# EAGLE board ThingPlus_Micromod-Panel (EAGLE 9.6.2), part 1 of 6
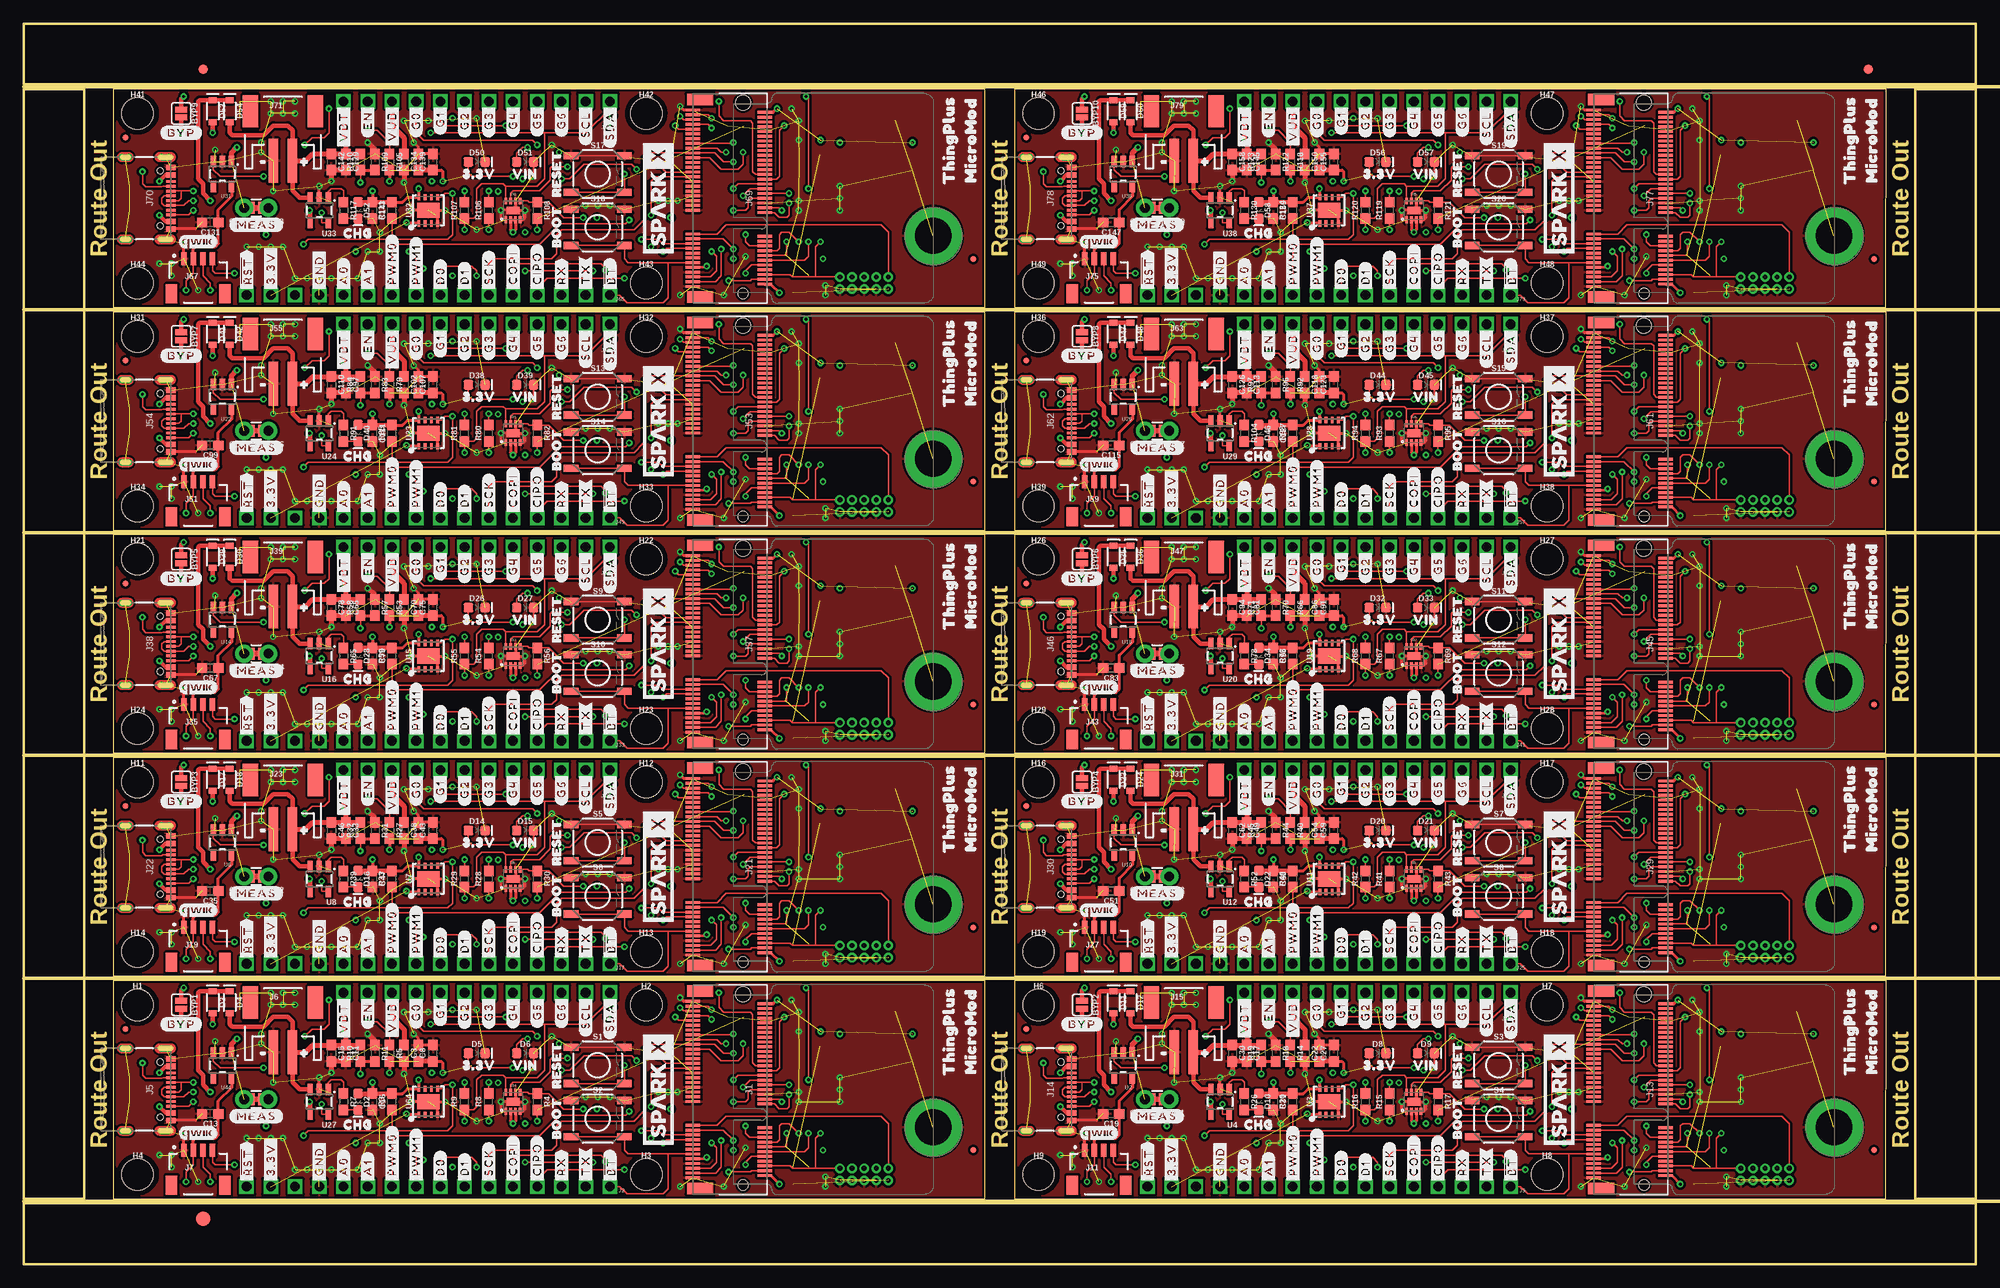
[diagram p0: board, top side]
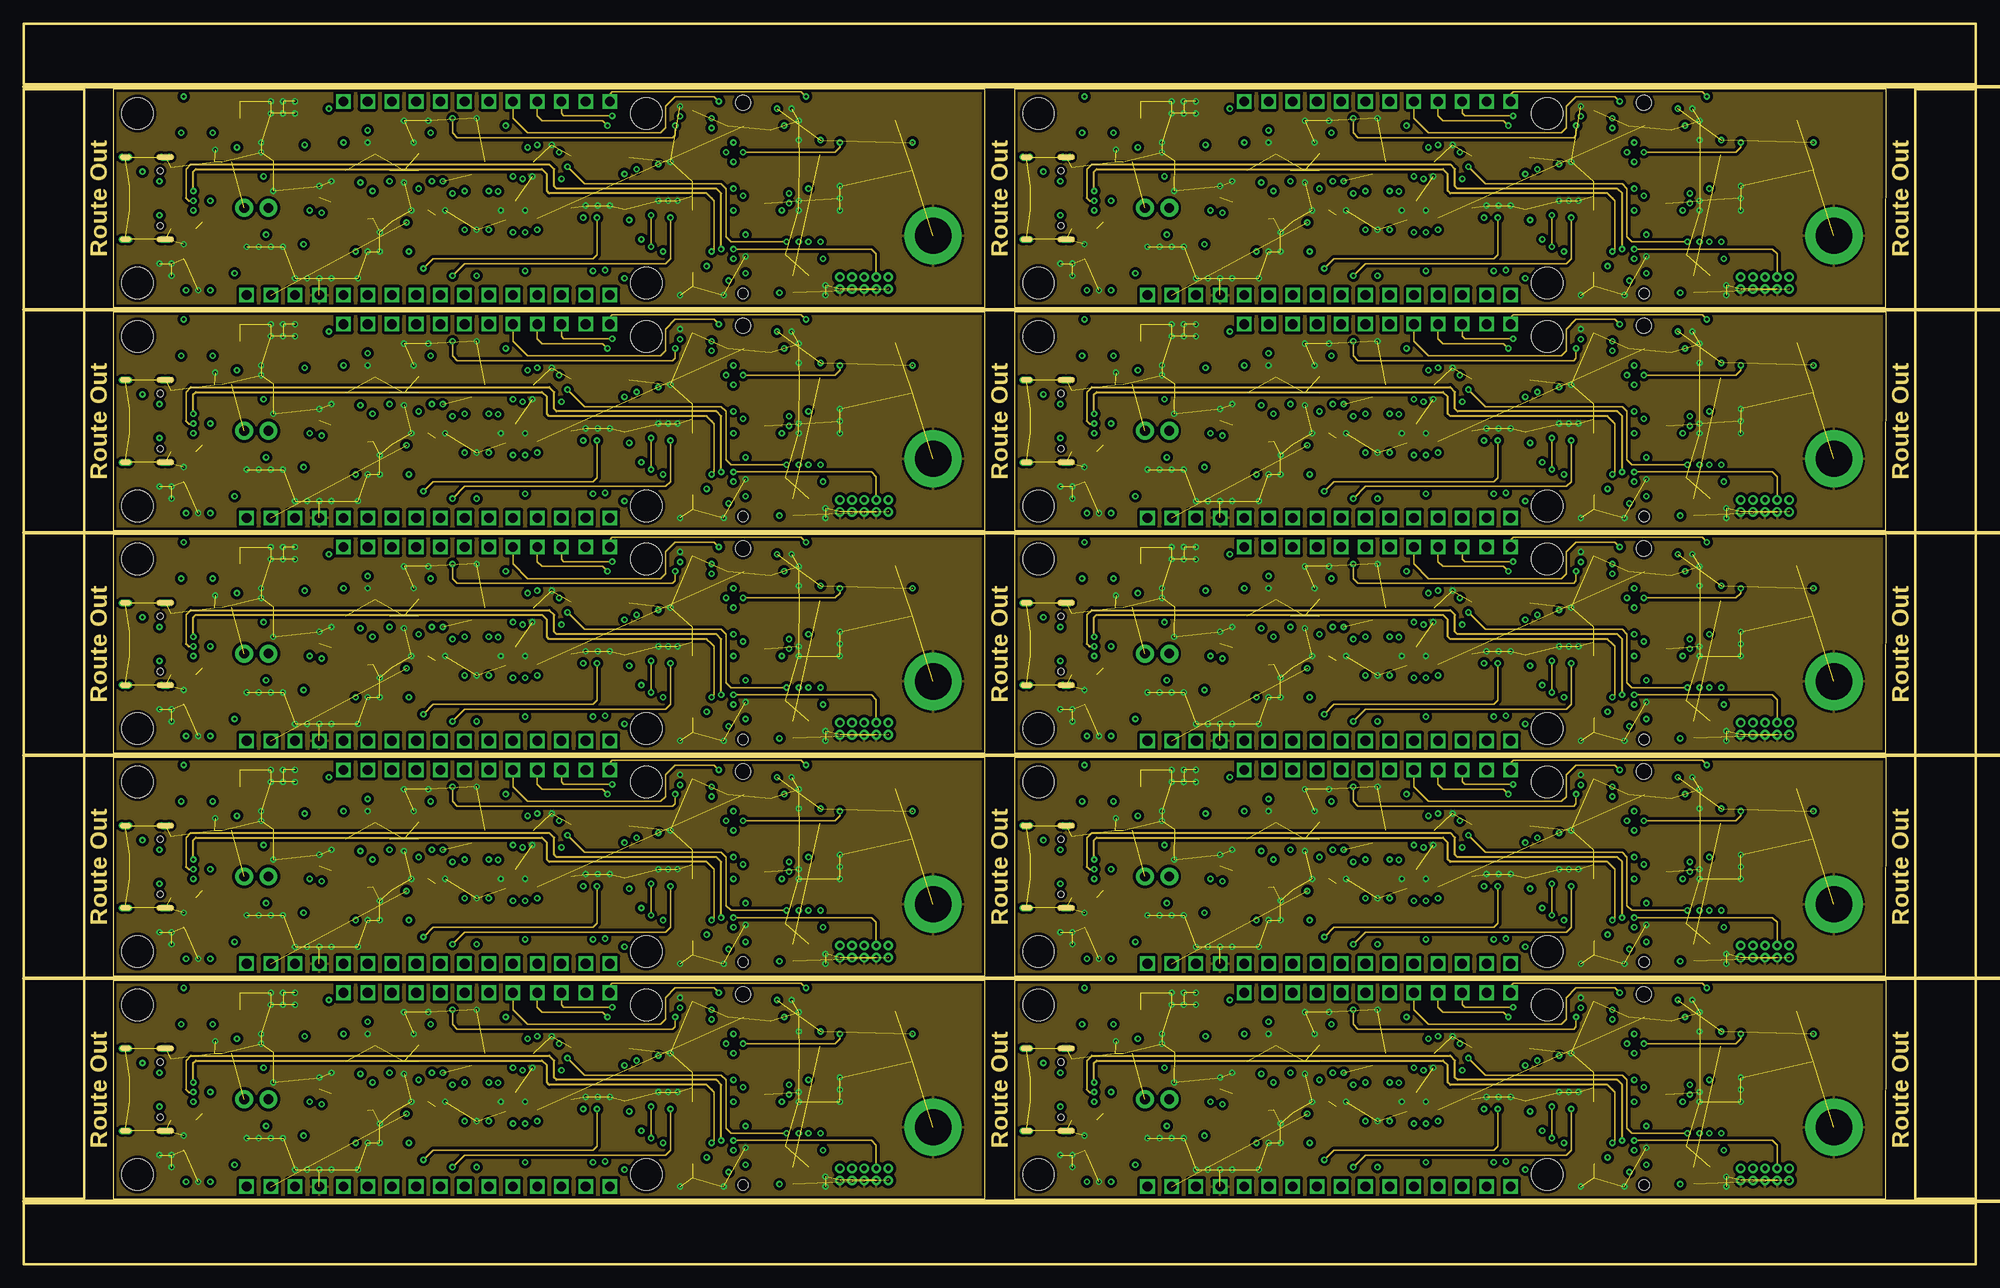
[diagram p1: board, inner layer Route2]
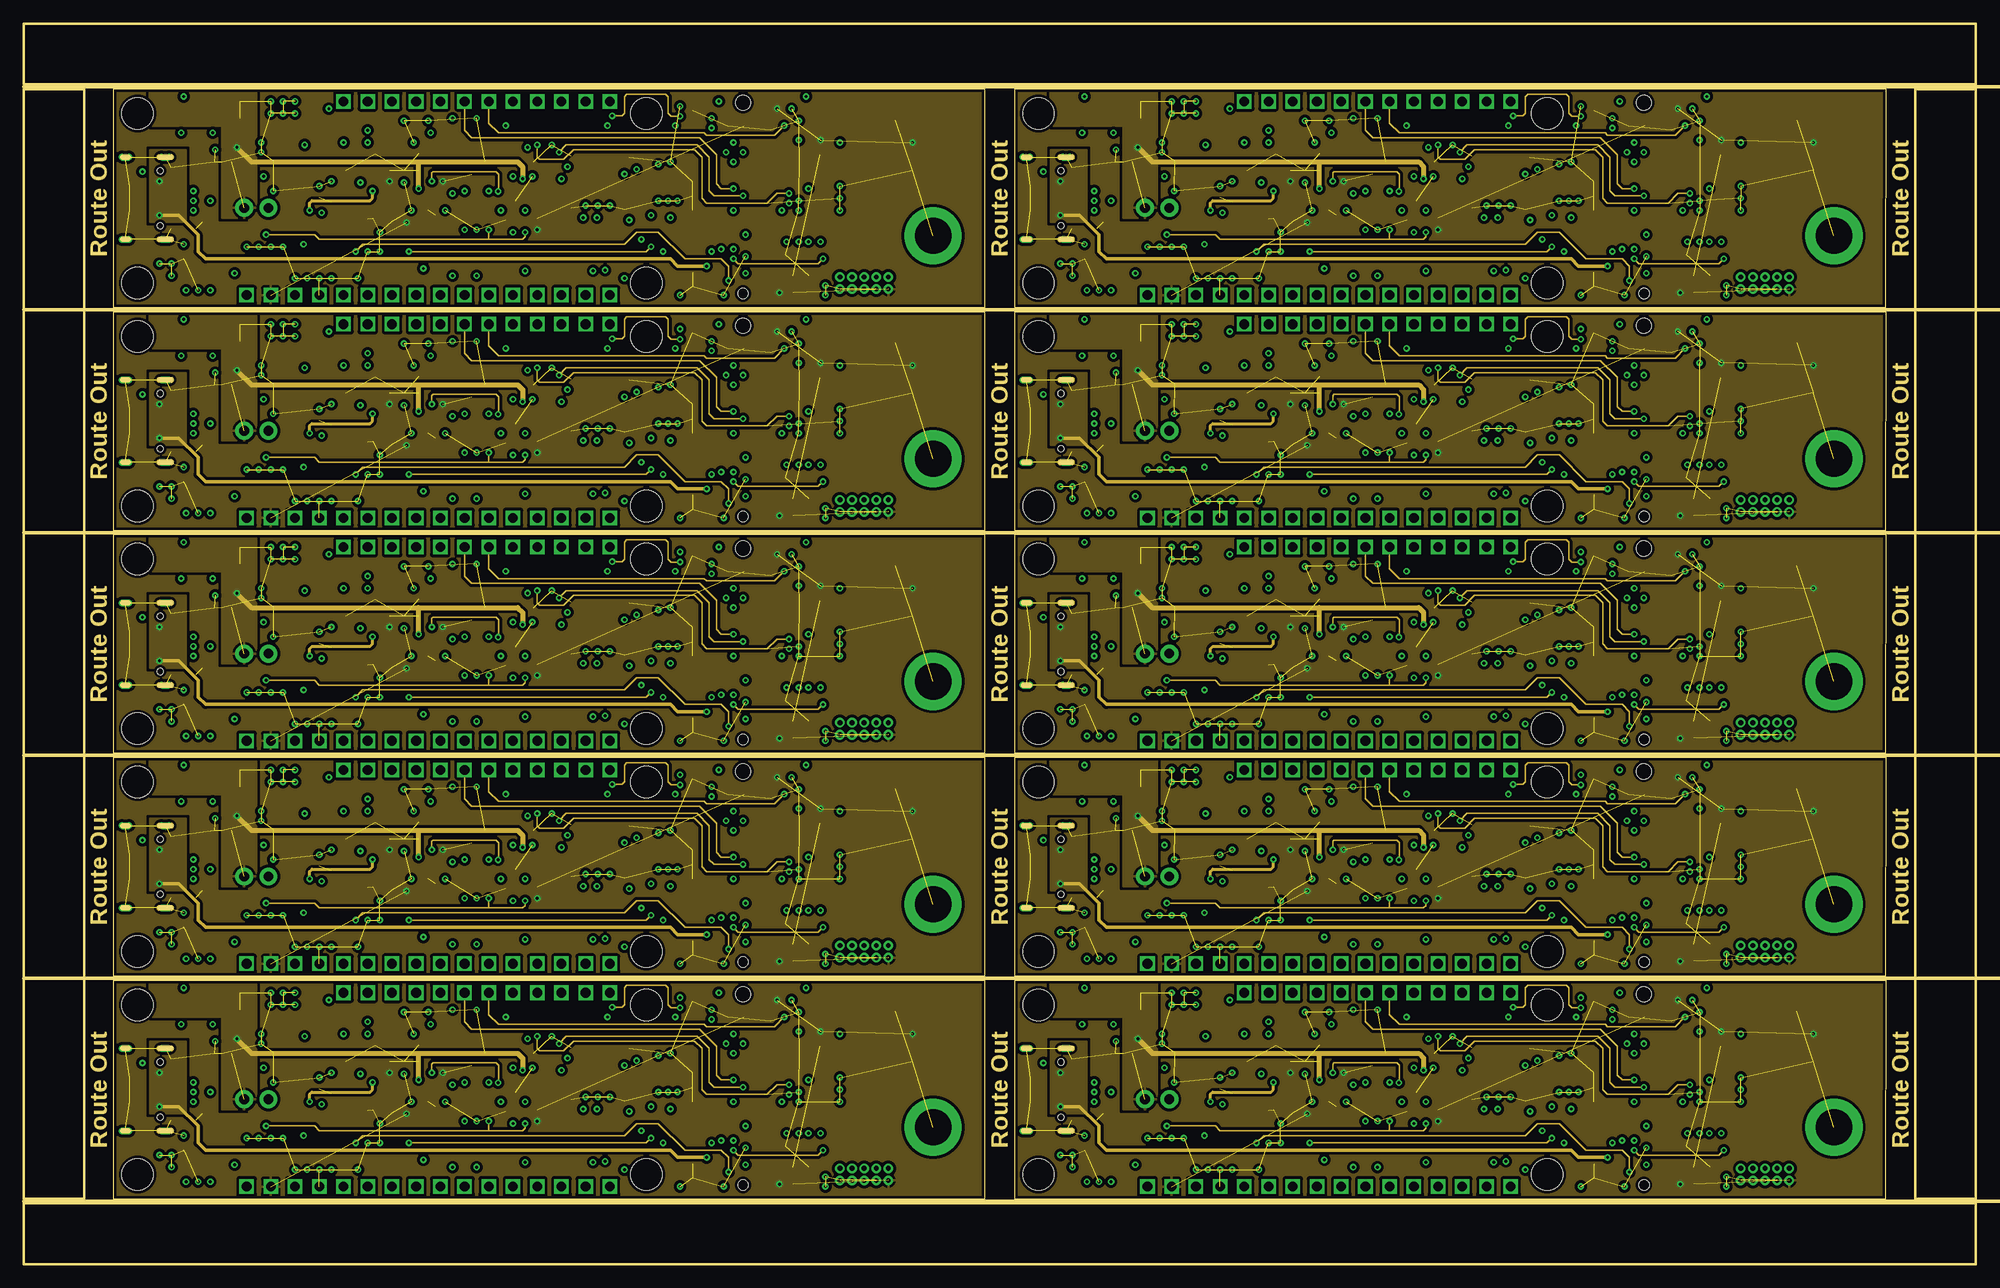
[diagram p2: board, inner layer Route15]
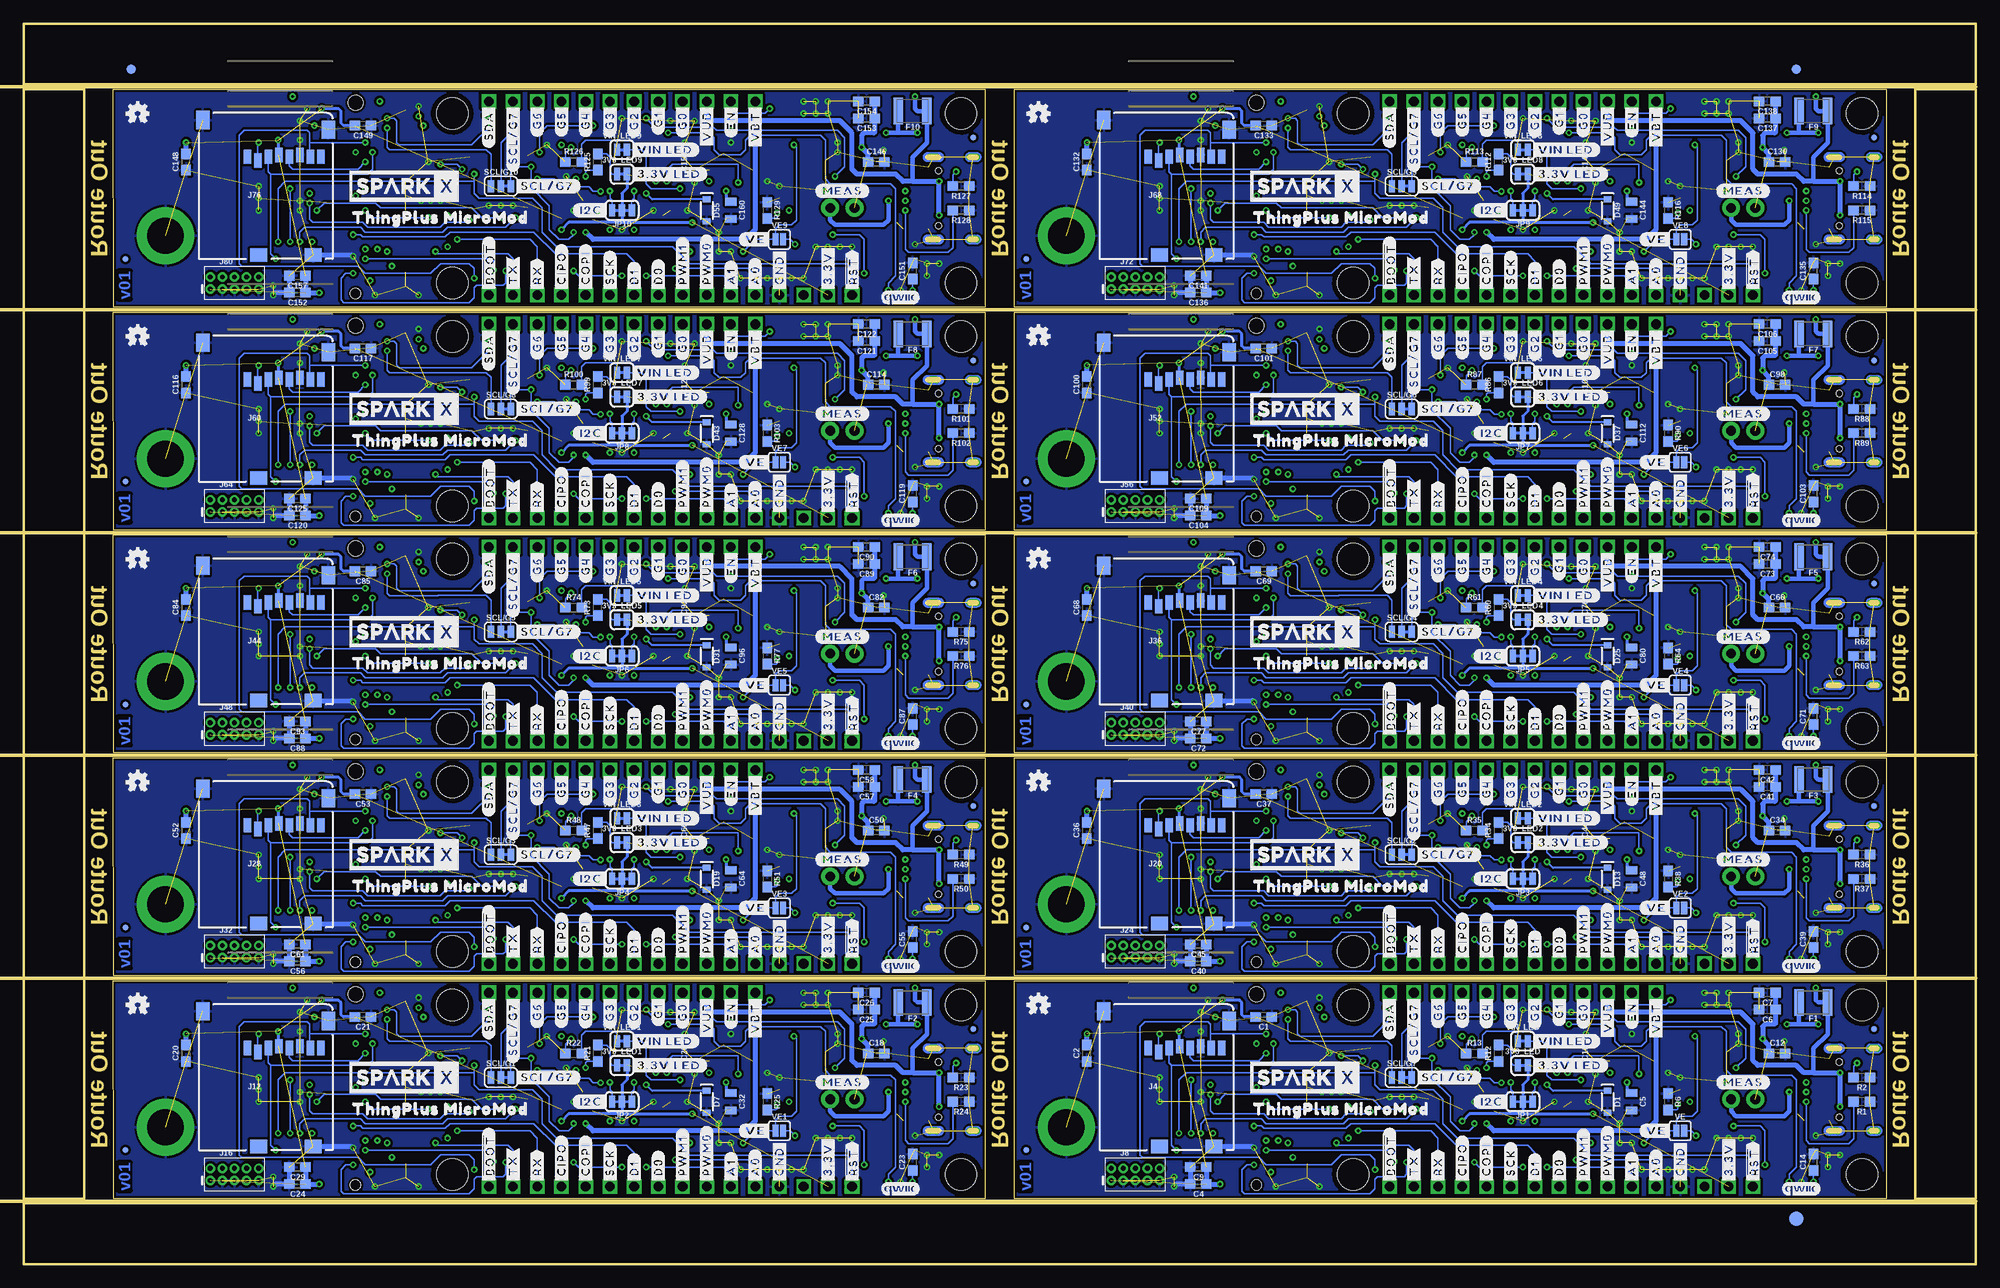
[diagram p3: board, bottom side, seen from below]

Size 204.72 x 130.05 mm. Coordinates in mm from the lower left corner, seen from the top.
Outline: 9.4,6.86 100.82,6.86 100.84,29.72 9.4,29.72 9.4,6.86
Outline: 103.89,6.86 195.31,6.86 195.33,29.72 103.89,29.72 103.89,6.86
Outline: 9.4,30.23 100.82,30.23 100.84,53.09 9.4,53.09 9.4,30.23
Outline: 103.89,30.23 195.31,30.23 195.33,53.09 103.89,53.09 103.89,30.23
Outline: 9.4,53.59 100.82,53.59 100.84,76.45 9.4,76.45 9.4,53.59
Outline: 103.89,53.59 195.31,53.59 195.33,76.45 103.89,76.45 103.89,53.59
Outline: 9.4,76.96 100.82,76.96 100.84,99.82 9.4,99.82 9.4,76.96
Outline: 103.89,76.96 195.31,76.96 195.33,99.82 103.89,99.82 103.89,76.96
Outline: 9.4,100.33 100.82,100.33 100.84,123.19 9.4,123.19 9.4,100.33
Outline: 103.89,100.33 195.31,100.33 195.33,123.19 103.89,123.19 103.89,100.33
Outline: 0,6.35 204.72,6.35 204.72,0 0,0 0,6.35
Outline: 198.37,123.19 204.72,123.19 204.72,6.86 198.37,6.86 198.37,123.19
Outline: 0,130.05 204.72,130.05 204.72,123.7 0,123.7 0,130.05
Outline: 0,123.19 6.35,123.19 6.35,6.86 0,6.86 0,123.19
Copper layers (1+2*15+16): Top 0.035559375mm / dielectric 0.47751875mm / Route2 0.035559375mm / dielectric 0.47751875mm / Route15 0.035559375mm / dielectric 0.47751875mm / Bottom 0.035559375mm
Design rules "ThingPlus_Micromod": minimum track width 7mil, minimum drill 12mil, track to track 7mil, track to pad 7mil, pad to pad 7mil, via to via 7mil, smd to smd 7mil, copper to edge 7mil, drill to drill 7mil, minimum pad ring 7mil, minimum via ring 7mil, stop-mask expansion 4mil, vias tented up to drill 25mil, thermal gap 10mil
Net classes: 0 default: width 0 mm, drill 0 mm
Milling: 6 lines

## Footprints (pad centres in the part's own frame; a part is rotated, then mirrored left to right if it is on the bottom)
SMT-JUMPER_2_NC_TRACE_SILK = smd 0.66 x 1.27: 1 -0.521,0; 2 0.521,0
SMT-JUMPER_2_NO_SILK = smd 0.635 x 1.27: 1 -0.406,0; 2 0.406,0
0603 = smd 1.1 x 1: 1 -0.85,0; 2 0.85,0
0805 = smd 0.8 x 1.2: 1 -0.9,0; 2 0.9,0
COMBO-JUMPER_2_NC_TRACE = smd 0.635 x 1.27: 1 -0.508,0; 2 0.508,0 | drill 1.016 pad 1.88: 3 -1.27,0; 4 1.27,0
SOD-323 = smd 0.63 x 0.83: A 1.15,0; C -1.15,0
LED-0603 = smd 1 x 1: A -0.877,0; C 0.877,0
FIDUCIAL-1X2 = smd 1 x 1: 1 0,0
FIDUCIAL-1.5X3 = smd 1.5 x 1.5: 1 0,0
1210 = smd 1 x 2.8: 1 -1.5,0; 2 1.5,0
FIDUCIAL-MICRO = smd 0.635 x 0.635: 1 0,0
STAND-OFF = hole 3.302: 0,0
STAND-OFF-REFLOW-M2.5 = drill 3.8 pad 6: 1 0,0
M.2-CONNECTOR-E = smd 0.3 x 1.55: 1 9.25,-5.275; 2 9,2.275; 3 8.75,-5.275; 4 8.5,2.275; 5 8.25,-5.275; 6 8,2.275; 7 7.75,-5.275; 8 7.5,2.275; 9 7.25,-5.275; 10 7,2.275; 11 6.75,-5.275; 12 6.5,2.275; 13 6.25,-5.275; 14 6,2.275; 15 5.75,-5.275; 16 5.5,2.275; 17 5.25,-5.275; 18 5,2.275; 19 4.75,-5.275; 20 4.5,2.275; 21 4.25,-5.275; 22 4,2.275; 23 3.75,-5.275; 32 1.5,2.275; 33 1.25,-5.275; 34 1,2.275; 35 0.75,-5.275; 36 0.5,2.275; 37 0.25,-5.275; 38 0,2.275; 39 -0.25,-5.275; 40 -0.5,2.275; 41 -0.75,-5.275; 42 -1,2.275; 43 -1.25,-5.275; 44 -1.5,2.275; 45 -1.75,-5.275; 46 -2,2.275; 47 -2.25,-5.275; 48 -2.5,2.275; 49 -2.75,-5.275; 50 -3,2.275; 51 -3.25,-5.275; 52 -3.5,2.275; 53 -3.75,-5.275; 54 -4,2.275; 55 -4.25,-5.275; 56 -4.5,2.275; 57 -4.75,-5.275; 58 -5,2.275; 59 -5.25,-5.275; 60 -5.5,2.275; 61 -5.75,-5.275; 62 -6,2.275; 63 -6.25,-5.275; 64 -6.5,2.275; 65 -6.75,-5.275; 66 -7,2.275; 67 -7.25,-5.275; 68 -7.5,2.275; 69 -7.75,-5.275; 70 -8,2.275; 71 -8.25,-5.275; 72 -8.5,2.275; 73 -8.75,-5.275; 74 -9,2.275; 75 -9.25,-5.275 | smd 1.2 x 2.75: A1 10.35,-4.5; A2 -10.35,-4.5 | hole 1.1: 10,0 | hole 1.6: -10,0
1X16_SM_SQ_NOSILK = drill 1.016 pad 1.27 square: 1 0,0; 2 2.54,0; 3 5.08,0; 4 7.62,0; 5 10.16,0; 6 12.7,0; 7 15.24,0; 8 17.78,0; 9 20.32,0; 10 22.86,0; 11 25.4,0; 12 27.94,0; 13 30.48,0; 14 33.02,0; 15 35.56,0; 16 38.1,0
1X12_SM_SQ_NOSILK = drill 1.016 pad 1.27 square: 1 0,0; 2 2.54,0; 3 5.08,0; 4 7.62,0; 5 10.16,0; 6 12.7,0; 7 15.24,0; 8 17.78,0; 9 20.32,0; 10 22.86,0; 11 25.4,0; 12 27.94,0
MICRO-SD-SOCKET = smd 1.8 x 1.4: CD1 -2.05,0.4; CD2 -7.75,0.4 | smd 0.8 x 1.5: CS/DAT3 -7.84,10.3; DAT1 -1.24,10.7; DAT2 -8.94,10.7; DI/CMD -6.74,10.7; DO/DAT0 -2.34,10.7; GND -3.44,10.9; SCLK -4.54,10.7; VCC -5.64,10.9 | smd 1.4 x 1.9: GND1 -13.6,14.55; GND3 -0.45,13.55
USB-C-16P_4LAYER-PADS = smd 0.3 x 1: A5 -1.25,-0.34; A6 -0.25,-0.34; A7 0.25,-0.34; A8 1.25,-0.34; B5 1.75,-0.34; B6 0.75,-0.34; B7 -0.75,-0.34; B8 -1.75,-0.34 | smd 0.6 x 1: GND -3.225,-0.34; GND2 3.225,-0.34; VBUS1 -2.45,-0.34; VBUS2 2.45,-0.34 | drill 0.4 pad 0.6 long: SHLD1 -4.318,-0.915; SHLD2 4.318,-0.915; SHLD3 -4.318,-5.095; SHLD4 4.318,-5.095 | hole 0.65: -2.89,-1.445; 2.89,-1.445
JST-2-SMD = smd 1 x 4.6: 1 -1,-3.7; 2 1,-3.7 | smd 1.6 x 3.4: NC1 -3.4,1.5; NC2 3.4,1.5
JST04_1MM_RA = smd 0.6 x 1.35: 1 -1.5,0; 2 -0.5,0; 3 0.5,0; 4 1.5,0 | smd 1.2 x 2: NC1 2.8,-3.675; NC2 -2.8,-3.675
2X5-PTH-1.27MM = drill 0.508 pad 1: 1 -2.54,-0.635; 2 -2.54,0.635; 3 -1.27,-0.635; 4 -1.27,0.635; 5 0,-0.635; 6 0,0.635; 7 1.27,-0.635; 8 1.27,0.635; 9 2.54,-0.635; 10 2.54,0.635
SMT-JUMPER_3_2-NC_TRACE_SILK = smd 0.66 x 1.27: 1 -1.041,0; 2 0,0; 3 1.041,0
TACTILE_SWITCH_SMD_5.2MM = smd 1.524 x 0.762: 1 -2.794,1.905; 2 2.794,1.905; 3 -2.794,-1.905; 4 2.794,-1.905
SMT-JUMPER_3_1-NC_TRACE_SILK = smd 0.66 x 1.27: 1 -1.041,0; 2 0,0; 3 1.041,0
DFN-8 = smd 0.3 x 0.7: 1 -0.75,-0.99; 2 -0.25,-0.99; 3 0.25,-0.99; 4 0.75,-0.99; 5 0.75,0.99; 6 0.25,0.99; 7 -0.25,0.99; 8 -0.75,0.99 | smd 1.38 x 0.8: 9 0,0
SOT23-5 = smd 0.55 x 1.2: 1 -0.95,-1.3; 2 0,-1.3; 3 0.95,-1.3; 4 0.95,1.3; 5 -0.95,1.3
UDFN-8 = smd 0.3 x 0.65: 1 -0.975,-1.375; 2 -0.325,-1.375; 3 0.325,-1.375; 4 0.975,-1.375; 5 0.975,1.375; 6 0.325,1.375; 7 -0.325,1.375; 8 -0.975,1.375 | smd 2.35 x 1.6: EP 0,0

## Placement (x,y rotation side)
3V3_LED  [SMT-JUMPER_2_NC_TRACE_SILK]  47.5,20.83 0 bottom
3V3_LED1  [SMT-JUMPER_2_NC_TRACE_SILK]  141.99,20.83 0 bottom
3V3_LED2  [SMT-JUMPER_2_NC_TRACE_SILK]  47.5,44.2 0 bottom
3V3_LED3  [SMT-JUMPER_2_NC_TRACE_SILK]  141.99,44.2 0 bottom
3V3_LED4  [SMT-JUMPER_2_NC_TRACE_SILK]  47.5,67.56 0 bottom
3V3_LED5  [SMT-JUMPER_2_NC_TRACE_SILK]  141.99,67.56 0 bottom
3V3_LED6  [SMT-JUMPER_2_NC_TRACE_SILK]  47.5,90.93 0 bottom
3V3_LED7  [SMT-JUMPER_2_NC_TRACE_SILK]  141.99,90.93 0 bottom
3V3_LED8  [SMT-JUMPER_2_NC_TRACE_SILK]  47.5,114.3 0 bottom
3V3_LED9  [SMT-JUMPER_2_NC_TRACE_SILK]  141.99,114.3 0 bottom
BYP1  JUMPER-SMT_2_NO_SILK  [SMT-JUMPER_2_NO_SILK]  16.51,27.18 270 top
BYP2  JUMPER-SMT_2_NO_SILK  [SMT-JUMPER_2_NO_SILK]  111,27.18 270 top
BYP3  JUMPER-SMT_2_NO_SILK  [SMT-JUMPER_2_NO_SILK]  16.51,50.55 270 top
BYP4  JUMPER-SMT_2_NO_SILK  [SMT-JUMPER_2_NO_SILK]  111,50.55 270 top
BYP5  JUMPER-SMT_2_NO_SILK  [SMT-JUMPER_2_NO_SILK]  16.51,73.91 270 top
BYP6  JUMPER-SMT_2_NO_SILK  [SMT-JUMPER_2_NO_SILK]  111,73.91 270 top
BYP7  JUMPER-SMT_2_NO_SILK  [SMT-JUMPER_2_NO_SILK]  16.51,97.28 270 top
BYP8  JUMPER-SMT_2_NO_SILK  [SMT-JUMPER_2_NO_SILK]  111,97.28 270 top
BYP9  JUMPER-SMT_2_NO_SILK  [SMT-JUMPER_2_NO_SILK]  16.51,120.65 270 top
BYP10  JUMPER-SMT_2_NO_SILK  [SMT-JUMPER_2_NO_SILK]  111,120.65 270 top
C1  0.1uF  [0603]  74.68,25.91 180 bottom
C2  1.0uF  [0603]  93.22,22.1 90 bottom
C3  0.1uF  [0603]  39.88,22.1 270 top
C4  0.1uF  [0603]  81.53,8.38 180 bottom
C5  10uF  [0805]  36.07,17.02 270 bottom
C6  0.22uF  [0603]  21.84,26.67 180 bottom
C7  0.1uF  [0603]  21.84,28.45 180 bottom
C8  1.0uF  [0603]  42.93,22.1 90 top
C9  0.22uF  [0603]  81.53,10.16 180 bottom
C10  0.1uF  [0603]  41.4,22.1 90 top
C11  0.1uF  [0603]  33.78,22.1 270 top
C12  1.0uF  [0603]  20.83,22.1 0 bottom
C13  1.0uF  [0603]  19.56,15.75 180 top
C14  0.1uF  [0603]  17.02,10.67 90 bottom
C15  4.7uF  [0603]  32.26,22.1 270 top
C16  4.7uF  [0603]  36.58,17.02 270 top
C17  0.1uF  [0603]  128.27,22.1 270 top
C18  1.0uF  [0603]  115.32,22.1 0 bottom
C19  1.0uF  [0603]  114.05,15.75 180 top
C20  1.0uF  [0603]  187.71,22.1 90 bottom
C21  0.1uF  [0603]  169.16,25.91 180 bottom
C22  0.1uF  [0603]  134.37,22.1 270 top
C23  0.1uF  [0603]  111.51,10.67 90 bottom
C24  0.1uF  [0603]  176.02,8.38 180 bottom
C25  0.22uF  [0603]  116.33,26.67 180 bottom
C26  0.1uF  [0603]  116.33,28.45 180 bottom
C27  1.0uF  [0603]  137.41,22.1 90 top
C28  0.1uF  [0603]  135.89,22.1 90 top
C29  0.22uF  [0603]  176.02,10.16 180 bottom
C30  4.7uF  [0603]  126.75,22.1 270 top
C31  4.7uF  [0603]  131.06,17.02 270 top
C32  10uF  [0805]  130.56,17.02 270 bottom
C33  0.1uF  [0603]  33.78,45.47 270 top
C34  1.0uF  [0603]  20.83,45.47 0 bottom
C35  1.0uF  [0603]  19.56,39.12 180 top
C36  1.0uF  [0603]  93.22,45.47 90 bottom
C37  0.1uF  [0603]  74.68,49.28 180 bottom
C38  0.1uF  [0603]  39.88,45.47 270 top
C39  0.1uF  [0603]  17.02,34.04 90 bottom
C40  0.1uF  [0603]  81.53,31.75 180 bottom
C41  0.22uF  [0603]  21.84,50.04 180 bottom
C42  0.1uF  [0603]  21.84,51.82 180 bottom
C43  1.0uF  [0603]  42.93,45.47 90 top
C44  0.1uF  [0603]  41.4,45.47 90 top
C45  0.22uF  [0603]  81.53,33.53 180 bottom
C46  4.7uF  [0603]  32.26,45.47 270 top
C47  4.7uF  [0603]  36.58,40.39 270 top
C48  10uF  [0805]  36.07,40.39 270 bottom
C49  0.1uF  [0603]  128.27,45.47 270 top
C50  1.0uF  [0603]  115.32,45.47 0 bottom
C51  1.0uF  [0603]  114.05,39.12 180 top
C52  1.0uF  [0603]  187.71,45.47 90 bottom
C53  0.1uF  [0603]  169.16,49.28 180 bottom
C54  0.1uF  [0603]  134.37,45.47 270 top
C55  0.1uF  [0603]  111.51,34.04 90 bottom
C56  0.1uF  [0603]  176.02,31.75 180 bottom
C57  0.22uF  [0603]  116.33,50.04 180 bottom
C58  0.1uF  [0603]  116.33,51.82 180 bottom
C59  1.0uF  [0603]  137.41,45.47 90 top
C60  0.1uF  [0603]  135.89,45.47 90 top
C61  0.22uF  [0603]  176.02,33.53 180 bottom
C62  4.7uF  [0603]  126.75,45.47 270 top
C63  4.7uF  [0603]  131.06,40.39 270 top
C64  10uF  [0805]  130.56,40.39 270 bottom
C65  0.1uF  [0603]  33.78,68.83 270 top
C66  1.0uF  [0603]  20.83,68.83 0 bottom
C67  1.0uF  [0603]  19.56,62.48 180 top
C68  1.0uF  [0603]  93.22,68.83 90 bottom
C69  0.1uF  [0603]  74.68,72.64 180 bottom
C70  0.1uF  [0603]  39.88,68.83 270 top
C71  0.1uF  [0603]  17.02,57.4 90 bottom
C72  0.1uF  [0603]  81.53,55.12 180 bottom
C73  0.22uF  [0603]  21.84,73.41 180 bottom
C74  0.1uF  [0603]  21.84,75.18 180 bottom
C75  1.0uF  [0603]  42.93,68.83 90 top
C76  0.1uF  [0603]  41.4,68.83 90 top
C77  0.22uF  [0603]  81.53,56.9 180 bottom
C78  4.7uF  [0603]  32.26,68.83 270 top
C79  4.7uF  [0603]  36.58,63.75 270 top
C80  10uF  [0805]  36.07,63.75 270 bottom
C81  0.1uF  [0603]  128.27,68.83 270 top
C82  1.0uF  [0603]  115.32,68.83 0 bottom
C83  1.0uF  [0603]  114.05,62.48 180 top
C84  1.0uF  [0603]  187.71,68.83 90 bottom
C85  0.1uF  [0603]  169.16,72.64 180 bottom
C86  0.1uF  [0603]  134.37,68.83 270 top
C87  0.1uF  [0603]  111.51,57.4 90 bottom
C88  0.1uF  [0603]  176.02,55.12 180 bottom
C89  0.22uF  [0603]  116.33,73.41 180 bottom
C90  0.1uF  [0603]  116.33,75.18 180 bottom
C91  1.0uF  [0603]  137.41,68.83 90 top
C92  0.1uF  [0603]  135.89,68.83 90 top
C93  0.22uF  [0603]  176.02,56.9 180 bottom
C94  4.7uF  [0603]  126.75,68.83 270 top
C95  4.7uF  [0603]  131.06,63.75 270 top
C96  10uF  [0805]  130.56,63.75 270 bottom
C97  0.1uF  [0603]  33.78,92.2 270 top
C98  1.0uF  [0603]  20.83,92.2 0 bottom
C99  1.0uF  [0603]  19.56,85.85 180 top
C100  1.0uF  [0603]  93.22,92.2 90 bottom
C101  0.1uF  [0603]  74.68,96.01 180 bottom
C102  0.1uF  [0603]  39.88,92.2 270 top
C103  0.1uF  [0603]  17.02,80.77 90 bottom
C104  0.1uF  [0603]  81.53,78.49 180 bottom
C105  0.22uF  [0603]  21.84,96.77 180 bottom
C106  0.1uF  [0603]  21.84,98.55 180 bottom
C107  1.0uF  [0603]  42.93,92.2 90 top
C108  0.1uF  [0603]  41.4,92.2 90 top
C109  0.22uF  [0603]  81.53,80.26 180 bottom
C110  4.7uF  [0603]  32.26,92.2 270 top
C111  4.7uF  [0603]  36.58,87.12 270 top
C112  10uF  [0805]  36.07,87.12 270 bottom
C113  0.1uF  [0603]  128.27,92.2 270 top
C114  1.0uF  [0603]  115.32,92.2 0 bottom
C115  1.0uF  [0603]  114.05,85.85 180 top
C116  1.0uF  [0603]  187.71,92.2 90 bottom
C117  0.1uF  [0603]  169.16,96.01 180 bottom
C118  0.1uF  [0603]  134.37,92.2 270 top
C119  0.1uF  [0603]  111.51,80.77 90 bottom
C120  0.1uF  [0603]  176.02,78.49 180 bottom
C121  0.22uF  [0603]  116.33,96.77 180 bottom
C122  0.1uF  [0603]  116.33,98.55 180 bottom
C123  1.0uF  [0603]  137.41,92.2 90 top
C124  0.1uF  [0603]  135.89,92.2 90 top
C125  0.22uF  [0603]  176.02,80.26 180 bottom
C126  4.7uF  [0603]  126.75,92.2 270 top
C127  4.7uF  [0603]  131.06,87.12 270 top
C128  10uF  [0805]  130.56,87.12 270 bottom
C129  0.1uF  [0603]  33.78,115.57 270 top
C130  1.0uF  [0603]  20.83,115.57 0 bottom
C131  1.0uF  [0603]  19.56,109.22 180 top
C132  1.0uF  [0603]  93.22,115.57 90 bottom
C133  0.1uF  [0603]  74.68,119.38 180 bottom
C134  0.1uF  [0603]  39.88,115.57 270 top
C135  0.1uF  [0603]  17.02,104.14 90 bottom
C136  0.1uF  [0603]  81.53,101.85 180 bottom
C137  0.22uF  [0603]  21.84,120.14 180 bottom
C138  0.1uF  [0603]  21.84,121.92 180 bottom
C139  1.0uF  [0603]  42.93,115.57 90 top
C140  0.1uF  [0603]  41.4,115.57 90 top
C141  0.22uF  [0603]  81.53,103.63 180 bottom
C142  4.7uF  [0603]  32.26,115.57 270 top
C143  4.7uF  [0603]  36.58,110.49 270 top
C144  10uF  [0805]  36.07,110.49 270 bottom
C145  0.1uF  [0603]  128.27,115.57 270 top
C146  1.0uF  [0603]  115.32,115.57 0 bottom
C147  1.0uF  [0603]  114.05,109.22 180 top
C148  1.0uF  [0603]  187.71,115.57 90 bottom
C149  0.1uF  [0603]  169.16,119.38 180 bottom
C150  0.1uF  [0603]  134.37,115.57 270 top
C151  0.1uF  [0603]  111.51,104.14 90 bottom
C152  0.1uF  [0603]  176.02,101.85 180 bottom
C153  0.22uF  [0603]  116.33,120.14 180 bottom
C154  0.1uF  [0603]  116.33,121.92 180 bottom
C155  1.0uF  [0603]  137.41,115.57 90 top
C156  0.1uF  [0603]  135.89,115.57 90 top
C157  0.22uF  [0603]  176.02,103.63 180 bottom
C158  4.7uF  [0603]  126.75,115.57 270 top
C159  4.7uF  [0603]  131.06,110.49 270 top
C160  10uF  [0805]  130.56,110.49 270 bottom
CURR_MEAS  [COMBO-JUMPER_2_NC_TRACE]  24.38,17.27 180 top
CURR_MEAS1  [COMBO-JUMPER_2_NC_TRACE]  118.87,17.27 180 top
CURR_MEAS2  [COMBO-JUMPER_2_NC_TRACE]  24.38,40.64 180 top
CURR_MEAS3  [COMBO-JUMPER_2_NC_TRACE]  118.87,40.64 180 top
CURR_MEAS4  [COMBO-JUMPER_2_NC_TRACE]  24.38,64.01 180 top
CURR_MEAS5  [COMBO-JUMPER_2_NC_TRACE]  118.87,64.01 180 top
CURR_MEAS6  [COMBO-JUMPER_2_NC_TRACE]  24.38,87.38 180 top
CURR_MEAS7  [COMBO-JUMPER_2_NC_TRACE]  118.87,87.38 180 top
CURR_MEAS8  [COMBO-JUMPER_2_NC_TRACE]  24.38,110.74 180 top
CURR_MEAS9  [COMBO-JUMPER_2_NC_TRACE]  118.87,110.74 180 top
D1  3.3V  [SOD-323]  38.61,17.02 270 bottom
D2  Yellow  [LED-0603]  35.05,17.02 270 top
D3  3A/10V/280mV  [SOD-323]  19.81,27.43 270 top
D4  3A/10V/280mV  [SOD-323]  21.59,27.43 270 top
D5  RED  [LED-0603]  47.5,22.1 0 top
D6  Yellow  [LED-0603]  52.58,22.1 0 top
D7  3.3V  [SOD-323]  133.1,17.02 270 bottom
D8  RED  [LED-0603]  141.99,22.1 0 top
D9  Yellow  [LED-0603]  147.07,22.1 0 top
D10  Yellow  [LED-0603]  129.54,17.02 270 top
D11  3A/10V/280mV  [SOD-323]  114.3,27.43 270 top
D12  3A/10V/280mV  [SOD-323]  116.08,27.43 270 top
D13  3.3V  [SOD-323]  38.61,40.39 270 bottom
D14  RED  [LED-0603]  47.5,45.47 0 top
D15  Yellow  [LED-0603]  52.58,45.47 0 top
D16  Yellow  [LED-0603]  35.05,40.39 270 top
D17  3A/10V/280mV  [SOD-323]  19.81,50.8 270 top
D18  3A/10V/280mV  [SOD-323]  21.59,50.8 270 top
D19  3.3V  [SOD-323]  133.1,40.39 270 bottom
D20  RED  [LED-0603]  141.99,45.47 0 top
D21  Yellow  [LED-0603]  147.07,45.47 0 top
D22  Yellow  [LED-0603]  129.54,40.39 270 top
D23  3A/10V/280mV  [SOD-323]  114.3,50.8 270 top
D24  3A/10V/280mV  [SOD-323]  116.08,50.8 270 top
D25  3.3V  [SOD-323]  38.61,63.75 270 bottom
D26  RED  [LED-0603]  47.5,68.83 0 top
D27  Yellow  [LED-0603]  52.58,68.83 0 top
D28  Yellow  [LED-0603]  35.05,63.75 270 top
D29  3A/10V/280mV  [SOD-323]  19.81,74.17 270 top
D30  3A/10V/280mV  [SOD-323]  21.59,74.17 270 top
D31  3.3V  [SOD-323]  133.1,63.75 270 bottom
D32  RED  [LED-0603]  141.99,68.83 0 top
D33  Yellow  [LED-0603]  147.07,68.83 0 top
D34  Yellow  [LED-0603]  129.54,63.75 270 top
D35  3A/10V/280mV  [SOD-323]  114.3,74.17 270 top
D36  3A/10V/280mV  [SOD-323]  116.08,74.17 270 top
D37  3.3V  [SOD-323]  38.61,87.12 270 bottom
D38  RED  [LED-0603]  47.5,92.2 0 top
D39  Yellow  [LED-0603]  52.58,92.2 0 top
D40  Yellow  [LED-0603]  35.05,87.12 270 top
D41  3A/10V/280mV  [SOD-323]  19.81,97.54 270 top
D42  3A/10V/280mV  [SOD-323]  21.59,97.54 270 top
D43  3.3V  [SOD-323]  133.1,87.12 270 bottom
D44  RED  [LED-0603]  141.99,92.2 0 top
D45  Yellow  [LED-0603]  147.07,92.2 0 top
D46  Yellow  [LED-0603]  129.54,87.12 270 top
D47  3A/10V/280mV  [SOD-323]  114.3,97.54 270 top
D48  3A/10V/280mV  [SOD-323]  116.08,97.54 270 top
D49  3.3V  [SOD-323]  38.61,110.49 270 bottom
D50  RED  [LED-0603]  47.5,115.57 0 top
D51  Yellow  [LED-0603]  52.58,115.57 0 top
D52  Yellow  [LED-0603]  35.05,110.49 270 top
D53  3A/10V/280mV  [SOD-323]  19.81,120.9 270 top
D54  3A/10V/280mV  [SOD-323]  21.59,120.9 270 top
D55  3.3V  [SOD-323]  133.1,110.49 270 bottom
D56  RED  [LED-0603]  141.99,115.57 0 top
D57  Yellow  [LED-0603]  147.07,115.57 0 top
D58  Yellow  [LED-0603]  129.54,110.49 270 top
D59  3A/10V/280mV  [SOD-323]  114.3,120.9 270 top
D60  3A/10V/280mV  [SOD-323]  116.08,120.9 270 top
E$1  [FIDUCIAL-1X2]  18.8,125.29 0 top
E$2  [FIDUCIAL-1X2]  18.8,125.29 0 bottom
E$3  [FIDUCIAL-1X2]  193.48,125.29 0 top
E$4  [FIDUCIAL-1X2]  193.48,125.29 0 bottom
E$5  [FIDUCIAL-1.5X3]  18.8,4.76 0 top
E$6  [FIDUCIAL-1.5X3]  18.8,4.76 0 bottom
F1  6V/2A  [1210]  17.02,27.43 180 bottom
F2  6V/2A  [1210]  111.51,27.43 180 bottom
F3  6V/2A  [1210]  17.02,50.8 180 bottom
F4  6V/2A  [1210]  111.51,50.8 180 bottom
F5  6V/2A  [1210]  17.02,74.17 180 bottom
F6  6V/2A  [1210]  111.51,74.17 180 bottom
F7  6V/2A  [1210]  17.02,97.54 180 bottom
F8  6V/2A  [1210]  111.51,97.54 180 bottom
F9  6V/2A  [1210]  17.02,120.9 180 bottom
F10  6V/2A  [1210]  111.51,120.9 180 bottom
FD1  FIDUCIALUFIDUCIAL  [FIDUCIAL-MICRO]  10.67,24.64 0 top
FD2  FIDUCIALUFIDUCIAL  [FIDUCIAL-MICRO]  10.67,24.64 0 bottom
FD3  FIDUCIALUFIDUCIAL  [FIDUCIAL-MICRO]  99.57,11.94 270 bottom
FD4  FIDUCIALUFIDUCIAL  [FIDUCIAL-MICRO]  99.57,11.94 0 top
FD5  FIDUCIALUFIDUCIAL  [FIDUCIAL-MICRO]  194.06,11.94 0 top
FD6  FIDUCIALUFIDUCIAL  [FIDUCIAL-MICRO]  105.16,24.64 0 top
FD7  FIDUCIALUFIDUCIAL  [FIDUCIAL-MICRO]  105.16,24.64 0 bottom
FD8  FIDUCIALUFIDUCIAL  [FIDUCIAL-MICRO]  194.06,11.94 270 bottom
FD9  FIDUCIALUFIDUCIAL  [FIDUCIAL-MICRO]  99.57,35.31 0 top
FD10  FIDUCIALUFIDUCIAL  [FIDUCIAL-MICRO]  10.67,48.01 0 top
FD11  FIDUCIALUFIDUCIAL  [FIDUCIAL-MICRO]  10.67,48.01 0 bottom
FD12  FIDUCIALUFIDUCIAL  [FIDUCIAL-MICRO]  99.57,35.31 270 bottom
FD13  FIDUCIALUFIDUCIAL  [FIDUCIAL-MICRO]  194.06,35.31 0 top
FD14  FIDUCIALUFIDUCIAL  [FIDUCIAL-MICRO]  105.16,48.01 0 top
FD15  FIDUCIALUFIDUCIAL  [FIDUCIAL-MICRO]  105.16,48.01 0 bottom
FD16  FIDUCIALUFIDUCIAL  [FIDUCIAL-MICRO]  194.06,35.31 270 bottom
FD17  FIDUCIALUFIDUCIAL  [FIDUCIAL-MICRO]  99.57,58.67 0 top
FD18  FIDUCIALUFIDUCIAL  [FIDUCIAL-MICRO]  10.67,71.37 0 top
FD19  FIDUCIALUFIDUCIAL  [FIDUCIAL-MICRO]  10.67,71.37 0 bottom
FD20  FIDUCIALUFIDUCIAL  [FIDUCIAL-MICRO]  99.57,58.67 270 bottom
FD21  FIDUCIALUFIDUCIAL  [FIDUCIAL-MICRO]  194.06,58.67 0 top
FD22  FIDUCIALUFIDUCIAL  [FIDUCIAL-MICRO]  105.16,71.37 0 top
FD23  FIDUCIALUFIDUCIAL  [FIDUCIAL-MICRO]  105.16,71.37 0 bottom
FD24  FIDUCIALUFIDUCIAL  [FIDUCIAL-MICRO]  194.06,58.67 270 bottom
FD25  FIDUCIALUFIDUCIAL  [FIDUCIAL-MICRO]  99.57,82.04 0 top
FD26  FIDUCIALUFIDUCIAL  [FIDUCIAL-MICRO]  10.67,94.74 0 top
FD27  FIDUCIALUFIDUCIAL  [FIDUCIAL-MICRO]  10.67,94.74 0 bottom
FD28  FIDUCIALUFIDUCIAL  [FIDUCIAL-MICRO]  99.57,82.04 270 bottom
FD29  FIDUCIALUFIDUCIAL  [FIDUCIAL-MICRO]  194.06,82.04 0 top
FD30  FIDUCIALUFIDUCIAL  [FIDUCIAL-MICRO]  105.16,94.74 0 top
FD31  FIDUCIALUFIDUCIAL  [FIDUCIAL-MICRO]  105.16,94.74 0 bottom
FD32  FIDUCIALUFIDUCIAL  [FIDUCIAL-MICRO]  194.06,82.04 270 bottom
FD33  FIDUCIALUFIDUCIAL  [FIDUCIAL-MICRO]  99.57,105.41 0 top
FD34  FIDUCIALUFIDUCIAL  [FIDUCIAL-MICRO]  10.67,118.11 0 top
FD35  FIDUCIALUFIDUCIAL  [FIDUCIAL-MICRO]  10.67,118.11 0 bottom
FD36  FIDUCIALUFIDUCIAL  [FIDUCIAL-MICRO]  99.57,105.41 270 bottom
FD37  FIDUCIALUFIDUCIAL  [FIDUCIAL-MICRO]  194.06,105.41 0 top
FD38  FIDUCIALUFIDUCIAL  [FIDUCIAL-MICRO]  105.16,118.11 0 top
FD39  FIDUCIALUFIDUCIAL  [FIDUCIAL-MICRO]  105.16,118.11 0 bottom
FD40  FIDUCIALUFIDUCIAL  [FIDUCIAL-MICRO]  194.06,105.41 270 bottom
FRAME1  FRAME-LEDGER  [CREATIVE_COMMONS]  32.51,30.73 0 top
FRAME2  FRAME-LEDGER  [CREATIVE_COMMONS]  127,30.73 0 top
FRAME3  FRAME-LEDGER  [CREATIVE_COMMONS]  32.51,54.1 0 top
FRAME4  FRAME-LEDGER  [CREATIVE_COMMONS]  127,54.1 0 top
FRAME5  FRAME-LEDGER  [CREATIVE_COMMONS]  32.51,77.47 0 top
FRAME6  FRAME-LEDGER  [CREATIVE_COMMONS]  127,77.47 0 top
FRAME7  FRAME-LEDGER  [CREATIVE_COMMONS]  32.51,100.84 0 top
FRAME8  FRAME-LEDGER  [CREATIVE_COMMONS]  127,100.84 0 top
FRAME9  FRAME-LEDGER  [CREATIVE_COMMONS]  32.51,124.21 0 top
FRAME10  FRAME-LEDGER  [CREATIVE_COMMONS]  127,124.21 0 top
H1  STAND-OFF  [STAND-OFF]  11.94,27.18 0 top
H2  STAND-OFF  [STAND-OFF]  65.28,27.18 0 top
H3  STAND-OFF  [STAND-OFF]  65.28,9.4 0 top
H4  STAND-OFF  [STAND-OFF]  11.94,9.4 0 top
H5  STAND-OFF-REFLOW2.5MM_TALL  [STAND-OFF-REFLOW-M2.5]  95.38,14.35 0 top
H6  STAND-OFF  [STAND-OFF]  106.43,27.18 0 top
H7  STAND-OFF  [STAND-OFF]  159.77,27.18 0 top
H8  STAND-OFF  [STAND-OFF]  159.77,9.4 0 top
H9  STAND-OFF  [STAND-OFF]  106.43,9.4 0 top
H10  STAND-OFF-REFLOW2.5MM_TALL  [STAND-OFF-REFLOW-M2.5]  189.87,14.35 0 top
H11  STAND-OFF  [STAND-OFF]  11.94,50.55 0 top
H12  STAND-OFF  [STAND-OFF]  65.28,50.55 0 top
H13  STAND-OFF  [STAND-OFF]  65.28,32.77 0 top
H14  STAND-OFF  [STAND-OFF]  11.94,32.77 0 top
H15  STAND-OFF-REFLOW2.5MM_TALL  [STAND-OFF-REFLOW-M2.5]  95.38,37.72 0 top
H16  STAND-OFF  [STAND-OFF]  106.43,50.55 0 top
H17  STAND-OFF  [STAND-OFF]  159.77,50.55 0 top
H18  STAND-OFF  [STAND-OFF]  159.77,32.77 0 top
H19  STAND-OFF  [STAND-OFF]  106.43,32.77 0 top
H20  STAND-OFF-REFLOW2.5MM_TALL  [STAND-OFF-REFLOW-M2.5]  189.87,37.72 0 top
H21  STAND-OFF  [STAND-OFF]  11.94,73.91 0 top
H22  STAND-OFF  [STAND-OFF]  65.28,73.91 0 top
H23  STAND-OFF  [STAND-OFF]  65.28,56.13 0 top
H24  STAND-OFF  [STAND-OFF]  11.94,56.13 0 top
H25  STAND-OFF-REFLOW2.5MM_TALL  [STAND-OFF-REFLOW-M2.5]  95.38,61.09 0 top
H26  STAND-OFF  [STAND-OFF]  106.43,73.91 0 top
H27  STAND-OFF  [STAND-OFF]  159.77,73.91 0 top
H28  STAND-OFF  [STAND-OFF]  159.77,56.13 0 top
H29  STAND-OFF  [STAND-OFF]  106.43,56.13 0 top
H30  STAND-OFF-REFLOW2.5MM_TALL  [STAND-OFF-REFLOW-M2.5]  189.87,61.09 0 top
H31  STAND-OFF  [STAND-OFF]  11.94,97.28 0 top
H32  STAND-OFF  [STAND-OFF]  65.28,97.28 0 top
H33  STAND-OFF  [STAND-OFF]  65.28,79.5 0 top
H34  STAND-OFF  [STAND-OFF]  11.94,79.5 0 top
H35  STAND-OFF-REFLOW2.5MM_TALL  [STAND-OFF-REFLOW-M2.5]  95.38,84.45 0 top
H36  STAND-OFF  [STAND-OFF]  106.43,97.28 0 top
H37  STAND-OFF  [STAND-OFF]  159.77,97.28 0 top
H38  STAND-OFF  [STAND-OFF]  159.77,79.5 0 top
H39  STAND-OFF  [STAND-OFF]  106.43,79.5 0 top
H40  STAND-OFF-REFLOW2.5MM_TALL  [STAND-OFF-REFLOW-M2.5]  189.87,84.45 0 top
H41  STAND-OFF  [STAND-OFF]  11.94,120.65 0 top
H42  STAND-OFF  [STAND-OFF]  65.28,120.65 0 top
H43  STAND-OFF  [STAND-OFF]  65.28,102.87 0 top
H44  STAND-OFF  [STAND-OFF]  11.94,102.87 0 top
H45  STAND-OFF-REFLOW2.5MM_TALL  [STAND-OFF-REFLOW-M2.5]  95.38,107.82 0 top
H46  STAND-OFF  [STAND-OFF]  106.43,120.65 0 top
H47  STAND-OFF  [STAND-OFF]  159.77,120.65 0 top
H48  STAND-OFF  [STAND-OFF]  159.77,102.87 0 top
H49  STAND-OFF  [STAND-OFF]  106.43,102.87 0 top
H50  STAND-OFF-REFLOW2.5MM_TALL  [STAND-OFF-REFLOW-M2.5]  189.87,107.82 0 top
J1  MICROMOD-2222-C  [M.2-CONNECTOR-E]  75.44,18.29 270 top
J2  [1X16_SM_SQ_NOSILK]  61.47,8.13 180 top
J3  [1X12_SM_SQ_NOSILK]  61.47,28.45 180 top
J4  MICRO-SD-SDIOPUSH-PUSH  [MICRO-SD-SOCKET]  77.85,11.94 0 bottom
J5  [USB-C-16P_4LAYER-PADS]  15.75,18.29 270 top
J6  [JST-2-SMD]  27.18,25.91 0 top
J7  QWIIC_RIGHT_ANGLE  [JST04_1MM_RA]  18.29,11.94 0 top
J8  JTAG  [2X5-PTH-1.27MM]  88.14,9.4 0 bottom
J9  [1X16_SM_SQ_NOSILK]  155.96,8.13 180 top
J10  [1X12_SM_SQ_NOSILK]  155.96,28.45 180 top
J11  QWIIC_RIGHT_ANGLE  [JST04_1MM_RA]  112.78,11.94 0 top
J12  MICRO-SD-SDIOPUSH-PUSH  [MICRO-SD-SOCKET]  172.34,11.94 0 bottom
J13  MICROMOD-2222-C  [M.2-CONNECTOR-E]  169.93,18.29 270 top
J14  [USB-C-16P_4LAYER-PADS]  110.24,18.29 270 top
J15  [JST-2-SMD]  121.67,25.91 0 top
J16  JTAG  [2X5-PTH-1.27MM]  182.63,9.4 0 bottom
J17  [1X16_SM_SQ_NOSILK]  61.47,31.5 180 top
J18  [1X12_SM_SQ_NOSILK]  61.47,51.82 180 top
J19  QWIIC_RIGHT_ANGLE  [JST04_1MM_RA]  18.29,35.31 0 top
J20  MICRO-SD-SDIOPUSH-PUSH  [MICRO-SD-SOCKET]  77.85,35.31 0 bottom
J21  MICROMOD-2222-C  [M.2-CONNECTOR-E]  75.44,41.66 270 top
J22  [USB-C-16P_4LAYER-PADS]  15.75,41.66 270 top
J23  [JST-2-SMD]  27.18,49.28 0 top
J24  JTAG  [2X5-PTH-1.27MM]  88.14,32.77 0 bottom
J25  [1X16_SM_SQ_NOSILK]  155.96,31.5 180 top
J26  [1X12_SM_SQ_NOSILK]  155.96,51.82 180 top
J27  QWIIC_RIGHT_ANGLE  [JST04_1MM_RA]  112.78,35.31 0 top
J28  MICRO-SD-SDIOPUSH-PUSH  [MICRO-SD-SOCKET]  172.34,35.31 0 bottom
J29  MICROMOD-2222-C  [M.2-CONNECTOR-E]  169.93,41.66 270 top
J30  [USB-C-16P_4LAYER-PADS]  110.24,41.66 270 top
J31  [JST-2-SMD]  121.67,49.28 0 top
J32  JTAG  [2X5-PTH-1.27MM]  182.63,32.77 0 bottom
J33  [1X16_SM_SQ_NOSILK]  61.47,54.86 180 top
J34  [1X12_SM_SQ_NOSILK]  61.47,75.18 180 top
J35  QWIIC_RIGHT_ANGLE  [JST04_1MM_RA]  18.29,58.67 0 top
J36  MICRO-SD-SDIOPUSH-PUSH  [MICRO-SD-SOCKET]  77.85,58.67 0 bottom
J37  MICROMOD-2222-C  [M.2-CONNECTOR-E]  75.44,65.02 270 top
J38  [USB-C-16P_4LAYER-PADS]  15.75,65.02 270 top
J39  [JST-2-SMD]  27.18,72.64 0 top
J40  JTAG  [2X5-PTH-1.27MM]  88.14,56.13 0 bottom
J41  [1X16_SM_SQ_NOSILK]  155.96,54.86 180 top
J42  [1X12_SM_SQ_NOSILK]  155.96,75.18 180 top
J43  QWIIC_RIGHT_ANGLE  [JST04_1MM_RA]  112.78,58.67 0 top
J44  MICRO-SD-SDIOPUSH-PUSH  [MICRO-SD-SOCKET]  172.34,58.67 0 bottom
J45  MICROMOD-2222-C  [M.2-CONNECTOR-E]  169.93,65.02 270 top
J46  [USB-C-16P_4LAYER-PADS]  110.24,65.02 270 top
J47  [JST-2-SMD]  121.67,72.64 0 top
J48  JTAG  [2X5-PTH-1.27MM]  182.63,56.13 0 bottom
J49  [1X16_SM_SQ_NOSILK]  61.47,78.23 180 top
J50  [1X12_SM_SQ_NOSILK]  61.47,98.55 180 top
J51  QWIIC_RIGHT_ANGLE  [JST04_1MM_RA]  18.29,82.04 0 top
J52  MICRO-SD-SDIOPUSH-PUSH  [MICRO-SD-SOCKET]  77.85,82.04 0 bottom
J53  MICROMOD-2222-C  [M.2-CONNECTOR-E]  75.44,88.39 270 top
J54  [USB-C-16P_4LAYER-PADS]  15.75,88.39 270 top
J55  [JST-2-SMD]  27.18,96.01 0 top
J56  JTAG  [2X5-PTH-1.27MM]  88.14,79.5 0 bottom
J57  [1X16_SM_SQ_NOSILK]  155.96,78.23 180 top
J58  [1X12_SM_SQ_NOSILK]  155.96,98.55 180 top
J59  QWIIC_RIGHT_ANGLE  [JST04_1MM_RA]  112.78,82.04 0 top
J60  MICRO-SD-SDIOPUSH-PUSH  [MICRO-SD-SOCKET]  172.34,82.04 0 bottom
J61  MICROMOD-2222-C  [M.2-CONNECTOR-E]  169.93,88.39 270 top
J62  [USB-C-16P_4LAYER-PADS]  110.24,88.39 270 top
J63  [JST-2-SMD]  121.67,96.01 0 top
J64  JTAG  [2X5-PTH-1.27MM]  182.63,79.5 0 bottom
J65  [1X16_SM_SQ_NOSILK]  61.47,101.6 180 top
J66  [1X12_SM_SQ_NOSILK]  61.47,121.92 180 top
J67  QWIIC_RIGHT_ANGLE  [JST04_1MM_RA]  18.29,105.41 0 top
J68  MICRO-SD-SDIOPUSH-PUSH  [MICRO-SD-SOCKET]  77.85,105.41 0 bottom
J69  MICROMOD-2222-C  [M.2-CONNECTOR-E]  75.44,111.76 270 top
J70  [USB-C-16P_4LAYER-PADS]  15.75,111.76 270 top
J71  [JST-2-SMD]  27.18,119.38 0 top
J72  JTAG  [2X5-PTH-1.27MM]  88.14,102.87 0 bottom
J73  [1X16_SM_SQ_NOSILK]  155.96,101.6 180 top
J74  [1X12_SM_SQ_NOSILK]  155.96,121.92 180 top
J75  QWIIC_RIGHT_ANGLE  [JST04_1MM_RA]  112.78,105.41 0 top
J76  MICRO-SD-SDIOPUSH-PUSH  [MICRO-SD-SOCKET]  172.34,105.41 0 bottom
J77  MICROMOD-2222-C  [M.2-CONNECTOR-E]  169.93,111.76 270 top
J78  [USB-C-16P_4LAYER-PADS]  110.24,111.76 270 top
J79  [JST-2-SMD]  121.67,119.38 0 top
J80  JTAG  [2X5-PTH-1.27MM]  182.63,102.87 0 bottom
JP1  JUMPER-SMT_3_2-NC_TRACE_SILK  [SMT-JUMPER_3_2-NC_TRACE_SILK]  47.5,17.02 180 bottom
JP2  JUMPER-SMT_3_2-NC_TRACE_SILK  [SMT-JUMPER_3_2-NC_TRACE_SILK]  141.99,17.02 180 bottom
JP3  JUMPER-SMT_3_2-NC_TRACE_SILK  [SMT-JUMPER_3_2-NC_TRACE_SILK]  47.5,40.39 180 bottom
JP4  JUMPER-SMT_3_2-NC_TRACE_SILK  [SMT-JUMPER_3_2-NC_TRACE_SILK]  141.99,40.39 180 bottom
JP5  JUMPER-SMT_3_2-NC_TRACE_SILK  [SMT-JUMPER_3_2-NC_TRACE_SILK]  47.5,63.75 180 bottom
JP6  JUMPER-SMT_3_2-NC_TRACE_SILK  [SMT-JUMPER_3_2-NC_TRACE_SILK]  141.99,63.75 180 bottom
JP7  JUMPER-SMT_3_2-NC_TRACE_SILK  [SMT-JUMPER_3_2-NC_TRACE_SILK]  47.5,87.12 180 bottom
JP8  JUMPER-SMT_3_2-NC_TRACE_SILK  [SMT-JUMPER_3_2-NC_TRACE_SILK]  141.99,87.12 180 bottom
JP9  JUMPER-SMT_3_2-NC_TRACE_SILK  [SMT-JUMPER_3_2-NC_TRACE_SILK]  47.5,110.49 180 bottom
JP10  JUMPER-SMT_3_2-NC_TRACE_SILK  [SMT-JUMPER_3_2-NC_TRACE_SILK]  141.99,110.49 180 bottom
LOGO1  OSHW-LOGOMINI  [OSHW-LOGO-MINI]  98.3,27.18 0 bottom
LOGO2  QWIIC_LOGO_4MM  [QWIIC_4MM]  18.29,13.72 0 top
LOGO3  QWIIC_LOGO_4MM  [QWIIC_4MM]  18.29,7.87 0 bottom
LOGO4  OSHW-LOGOMINI  [OSHW-LOGO-MINI]  192.79,27.18 0 bottom
LOGO5  QWIIC_LOGO_4MM  [QWIIC_4MM]  112.78,13.72 0 top
LOGO6  QWIIC_LOGO_4MM  [QWIIC_4MM]  112.78,7.87 0 bottom
LOGO7  OSHW-LOGOMINI  [OSHW-LOGO-MINI]  98.3,50.55 0 bottom
LOGO8  QWIIC_LOGO_4MM  [QWIIC_4MM]  18.29,37.08 0 top
LOGO9  QWIIC_LOGO_4MM  [QWIIC_4MM]  18.29,31.24 0 bottom
LOGO10  OSHW-LOGOMINI  [OSHW-LOGO-MINI]  192.79,50.55 0 bottom
LOGO11  QWIIC_LOGO_4MM  [QWIIC_4MM]  112.78,37.08 0 top
LOGO12  QWIIC_LOGO_4MM  [QWIIC_4MM]  112.78,31.24 0 bottom
LOGO13  OSHW-LOGOMINI  [OSHW-LOGO-MINI]  98.3,73.91 0 bottom
LOGO14  QWIIC_LOGO_4MM  [QWIIC_4MM]  18.29,60.45 0 top
LOGO15  QWIIC_LOGO_4MM  [QWIIC_4MM]  18.29,54.61 0 bottom
LOGO16  OSHW-LOGOMINI  [OSHW-LOGO-MINI]  192.79,73.91 0 bottom
LOGO17  QWIIC_LOGO_4MM  [QWIIC_4MM]  112.78,60.45 0 top
LOGO18  QWIIC_LOGO_4MM  [QWIIC_4MM]  112.78,54.61 0 bottom
LOGO19  OSHW-LOGOMINI  [OSHW-LOGO-MINI]  98.3,97.28 0 bottom
LOGO20  QWIIC_LOGO_4MM  [QWIIC_4MM]  18.29,83.82 0 top
LOGO21  QWIIC_LOGO_4MM  [QWIIC_4MM]  18.29,77.98 0 bottom
LOGO22  OSHW-LOGOMINI  [OSHW-LOGO-MINI]  192.79,97.28 0 bottom
LOGO23  QWIIC_LOGO_4MM  [QWIIC_4MM]  112.78,83.82 0 top
LOGO24  QWIIC_LOGO_4MM  [QWIIC_4MM]  112.78,77.98 0 bottom
LOGO25  OSHW-LOGOMINI  [OSHW-LOGO-MINI]  98.3,120.65 0 bottom
LOGO26  QWIIC_LOGO_4MM  [QWIIC_4MM]  18.29,107.19 0 top
LOGO27  QWIIC_LOGO_4MM  [QWIIC_4MM]  18.29,101.35 0 bottom
LOGO28  OSHW-LOGOMINI  [OSHW-LOGO-MINI]  192.79,120.65 0 bottom
LOGO29  QWIIC_LOGO_4MM  [QWIIC_4MM]  112.78,107.19 0 top
LOGO30  QWIIC_LOGO_4MM  [QWIIC_4MM]  112.78,101.35 0 bottom
R1  5.1k  [0603]  11.94,17.02 180 bottom
R2  5.1k  [0603]  11.94,19.56 180 bottom
R3  100k  [0603]  38.61,17.02 90 top
R4  10k  [0603]  53.85,17.02 270 top
R5  100k  [0603]  38.35,22.1 270 top
R6  2.2k  [0603]  32.26,17.02 270 bottom
R7  1k  [0603]  33.53,17.02 270 top
R8  2.2k  [0603]  48.77,17.02 90 top
R9  2.2k  [0603]  46.23,17.02 90 top
R10  20k  [0603]  35.31,22.1 90 top
R11  10k  [0603]  36.83,22.1 270 top
R12  1k  [0603]  50.04,22.1 90 bottom
R13  4.7k  [0603]  52.58,22.1 0 bottom
R14  100k  [0603]  132.84,22.1 270 top
R15  2.2k  [0603]  143.26,17.02 90 top
R16  2.2k  [0603]  140.72,17.02 90 top
R17  10k  [0603]  148.34,17.02 270 top
R18  10k  [0603]  131.32,22.1 270 top
R19  20k  [0603]  129.79,22.1 90 top
R20  100k  [0603]  133.1,17.02 90 top
R21  1k  [0603]  144.53,22.1 90 bottom
R22  4.7k  [0603]  147.07,22.1 0 bottom
R23  5.1k  [0603]  106.43,19.56 180 bottom
R24  5.1k  [0603]  106.43,17.02 180 bottom
R25  2.2k  [0603]  126.75,17.02 270 bottom
R26  1k  [0603]  128.02,17.02 270 top
R27  100k  [0603]  38.35,45.47 270 top
R28  2.2k  [0603]  48.77,40.39 90 top
R29  2.2k  [0603]  46.23,40.39 90 top
R30  10k  [0603]  53.85,40.39 270 top
R31  10k  [0603]  36.83,45.47 270 top
R32  20k  [0603]  35.31,45.47 90 top
R33  100k  [0603]  38.61,40.39 90 top
R34  1k  [0603]  50.04,45.47 90 bottom
R35  4.7k  [0603]  52.58,45.47 0 bottom
R36  5.1k  [0603]  11.94,42.93 180 bottom
R37  5.1k  [0603]  11.94,40.39 180 bottom
R38  2.2k  [0603]  32.26,40.39 270 bottom
R39  1k  [0603]  33.53,40.39 270 top
R40  100k  [0603]  132.84,45.47 270 top
R41  2.2k  [0603]  143.26,40.39 90 top
R42  2.2k  [0603]  140.72,40.39 90 top
R43  10k  [0603]  148.34,40.39 270 top
R44  10k  [0603]  131.32,45.47 270 top
R45  20k  [0603]  129.79,45.47 90 top
R46  100k  [0603]  133.1,40.39 90 top
R47  1k  [0603]  144.53,45.47 90 bottom
R48  4.7k  [0603]  147.07,45.47 0 bottom
R49  5.1k  [0603]  106.43,42.93 180 bottom
R50  5.1k  [0603]  106.43,40.39 180 bottom
R51  2.2k  [0603]  126.75,40.39 270 bottom
R52  1k  [0603]  128.02,40.39 270 top
R53  100k  [0603]  38.35,68.83 270 top
R54  2.2k  [0603]  48.77,63.75 90 top
R55  2.2k  [0603]  46.23,63.75 90 top
R56  10k  [0603]  53.85,63.75 270 top
R57  10k  [0603]  36.83,68.83 270 top
R58  20k  [0603]  35.31,68.83 90 top
R59  100k  [0603]  38.61,63.75 90 top
R60  1k  [0603]  50.04,68.83 90 bottom
R61  4.7k  [0603]  52.58,68.83 0 bottom
R62  5.1k  [0603]  11.94,66.29 180 bottom
R63  5.1k  [0603]  11.94,63.75 180 bottom
R64  2.2k  [0603]  32.26,63.75 270 bottom
R65  1k  [0603]  33.53,63.75 270 top
R66  100k  [0603]  132.84,68.83 270 top
R67  2.2k  [0603]  143.26,63.75 90 top
R68  2.2k  [0603]  140.72,63.75 90 top
R69  10k  [0603]  148.34,63.75 270 top
R70  10k  [0603]  131.32,68.83 270 top
R71  20k  [0603]  129.79,68.83 90 top
R72  100k  [0603]  133.1,63.75 90 top
R73  1k  [0603]  144.53,68.83 90 bottom
R74  4.7k  [0603]  147.07,68.83 0 bottom
R75  5.1k  [0603]  106.43,66.29 180 bottom
R76  5.1k  [0603]  106.43,63.75 180 bottom
R77  2.2k  [0603]  126.75,63.75 270 bottom
R78  1k  [0603]  128.02,63.75 270 top
R79  100k  [0603]  38.35,92.2 270 top
R80  2.2k  [0603]  48.77,87.12 90 top
R81  2.2k  [0603]  46.23,87.12 90 top
R82  10k  [0603]  53.85,87.12 270 top
R83  10k  [0603]  36.83,92.2 270 top
R84  20k  [0603]  35.31,92.2 90 top
R85  100k  [0603]  38.61,87.12 90 top
R86  1k  [0603]  50.04,92.2 90 bottom
R87  4.7k  [0603]  52.58,92.2 0 bottom
R88  5.1k  [0603]  11.94,89.66 180 bottom
R89  5.1k  [0603]  11.94,87.12 180 bottom
R90  2.2k  [0603]  32.26,87.12 270 bottom
R91  1k  [0603]  33.53,87.12 270 top
R92  100k  [0603]  132.84,92.2 270 top
R93  2.2k  [0603]  143.26,87.12 90 top
R94  2.2k  [0603]  140.72,87.12 90 top
R95  10k  [0603]  148.34,87.12 270 top
R96  10k  [0603]  131.32,92.2 270 top
R97  20k  [0603]  129.79,92.2 90 top
R98  100k  [0603]  133.1,87.12 90 top
R99  1k  [0603]  144.53,92.2 90 bottom
R100  4.7k  [0603]  147.07,92.2 0 bottom
R101  5.1k  [0603]  106.43,89.66 180 bottom
R102  5.1k  [0603]  106.43,87.12 180 bottom
R103  2.2k  [0603]  126.75,87.12 270 bottom
R104  1k  [0603]  128.02,87.12 270 top
R105  100k  [0603]  38.35,115.57 270 top
R106  2.2k  [0603]  48.77,110.49 90 top
R107  2.2k  [0603]  46.23,110.49 90 top
R108  10k  [0603]  53.85,110.49 270 top
R109  10k  [0603]  36.83,115.57 270 top
R110  20k  [0603]  35.31,115.57 90 top
R111  100k  [0603]  38.61,110.49 90 top
R112  1k  [0603]  50.04,115.57 90 bottom
R113  4.7k  [0603]  52.58,115.57 0 bottom
R114  5.1k  [0603]  11.94,113.03 180 bottom
R115  5.1k  [0603]  11.94,110.49 180 bottom
R116  2.2k  [0603]  32.26,110.49 270 bottom
R117  1k  [0603]  33.53,110.49 270 top
R118  100k  [0603]  132.84,115.57 270 top
R119  2.2k  [0603]  143.26,110.49 90 top
R120  2.2k  [0603]  140.72,110.49 90 top
R121  10k  [0603]  148.34,110.49 270 top
R122  10k  [0603]  131.32,115.57 270 top
R123  20k  [0603]  129.79,115.57 90 top
R124  100k  [0603]  133.1,110.49 90 top
R125  1k  [0603]  144.53,115.57 90 bottom
R126  4.7k  [0603]  147.07,115.57 0 bottom
R127  5.1k  [0603]  106.43,113.03 180 bottom
R128  5.1k  [0603]  106.43,110.49 180 bottom
R129  2.2k  [0603]  126.75,110.49 270 bottom
R130  1k  [0603]  128.02,110.49 270 top
S1  Reset  [TACTILE_SWITCH_SMD_5.2MM]  60.2,20.83 0 top
S2  BOOT  [TACTILE_SWITCH_SMD_5.2MM]  60.2,15.24 0 top
S3  Reset  [TACTILE_SWITCH_SMD_5.2MM]  154.69,20.83 0 top
S4  BOOT  [TACTILE_SWITCH_SMD_5.2MM]  154.69,15.24 0 top
S5  Reset  [TACTILE_SWITCH_SMD_5.2MM]  60.2,44.2 0 top
S6  BOOT  [TACTILE_SWITCH_SMD_5.2MM]  60.2,38.61 0 top
S7  Reset  [TACTILE_SWITCH_SMD_5.2MM]  154.69,44.2 0 top
S8  BOOT  [TACTILE_SWITCH_SMD_5.2MM]  154.69,38.61 0 top
S9  Reset  [TACTILE_SWITCH_SMD_5.2MM]  60.2,67.56 0 top
S10  BOOT  [TACTILE_SWITCH_SMD_5.2MM]  60.2,61.98 0 top
S11  Reset  [TACTILE_SWITCH_SMD_5.2MM]  154.69,67.56 0 top
S12  BOOT  [TACTILE_SWITCH_SMD_5.2MM]  154.69,61.98 0 top
S13  Reset  [TACTILE_SWITCH_SMD_5.2MM]  60.2,90.93 0 top
S14  BOOT  [TACTILE_SWITCH_SMD_5.2MM]  60.2,85.34 0 top
S15  Reset  [TACTILE_SWITCH_SMD_5.2MM]  154.69,90.93 0 top
S16  BOOT  [TACTILE_SWITCH_SMD_5.2MM]  154.69,85.34 0 top
S17  Reset  [TACTILE_SWITCH_SMD_5.2MM]  60.2,114.3 0 top
S18  BOOT  [TACTILE_SWITCH_SMD_5.2MM]  60.2,108.71 0 top
S19  Reset  [TACTILE_SWITCH_SMD_5.2MM]  154.69,114.3 0 top
S20  BOOT  [TACTILE_SWITCH_SMD_5.2MM]  154.69,108.71 0 top
SCL/G1  JUMPER-SMT_3_1-NC_TRACE_SILK  [SMT-JUMPER_3_1-NC_TRACE_SILK]  154.69,19.56 0 bottom
SCL/G2  JUMPER-SMT_3_1-NC_TRACE_SILK  [SMT-JUMPER_3_1-NC_TRACE_SILK]  60.2,42.93 0 bottom
SCL/G3  JUMPER-SMT_3_1-NC_TRACE_SILK  [SMT-JUMPER_3_1-NC_TRACE_SILK]  154.69,42.93 0 bottom
SCL/G4  JUMPER-SMT_3_1-NC_TRACE_SILK  [SMT-JUMPER_3_1-NC_TRACE_SILK]  60.2,66.29 0 bottom
SCL/G5  JUMPER-SMT_3_1-NC_TRACE_SILK  [SMT-JUMPER_3_1-NC_TRACE_SILK]  154.69,66.29 0 bottom
SCL/G6  JUMPER-SMT_3_1-NC_TRACE_SILK  [SMT-JUMPER_3_1-NC_TRACE_SILK]  60.2,89.66 0 bottom
SCL/G7  JUMPER-SMT_3_1-NC_TRACE_SILK  [SMT-JUMPER_3_1-NC_TRACE_SILK]  60.2,19.56 0 bottom
SCL/G8  JUMPER-SMT_3_1-NC_TRACE_SILK  [SMT-JUMPER_3_1-NC_TRACE_SILK]  154.69,89.66 0 bottom
SCL/G9  JUMPER-SMT_3_1-NC_TRACE_SILK  [SMT-JUMPER_3_1-NC_TRACE_SILK]  60.2,113.03 0 bottom
SCL/G10  JUMPER-SMT_3_1-NC_TRACE_SILK  [SMT-JUMPER_3_1-NC_TRACE_SILK]  154.69,113.03 0 bottom
U1  MAX17048  [DFN-8]  145.8,17.02 0 top
U2  3.3V  [SOT23-5]  115.32,20.83 180 top
U3  AP7361C-33  [UDFN-8]  136.91,17.02 0 top
U4  MCP73831  [SOT23-5]  125.48,17.02 180 top
U5  MAX17048  [DFN-8]  51.31,40.39 0 top
U6  3.3V  [SOT23-5]  20.83,44.2 180 top
U7  AP7361C-33  [UDFN-8]  42.42,40.39 0 top
U8  MCP73831  [SOT23-5]  30.99,40.39 180 top
U9  MAX17048  [DFN-8]  145.8,40.39 0 top
U10  3.3V  [SOT23-5]  115.32,44.2 180 top
U11  AP7361C-33  [UDFN-8]  136.91,40.39 0 top
U12  MCP73831  [SOT23-5]  125.48,40.39 180 top
U13  MAX17048  [DFN-8]  51.31,63.75 0 top
U14  3.3V  [SOT23-5]  20.83,67.56 180 top
U15  AP7361C-33  [UDFN-8]  42.42,63.75 0 top
U16  MCP73831  [SOT23-5]  30.99,63.75 180 top
U17  MAX17048  [DFN-8]  145.8,63.75 0 top
U18  3.3V  [SOT23-5]  115.32,67.56 180 top
U19  AP7361C-33  [UDFN-8]  136.91,63.75 0 top
U20  MCP73831  [SOT23-5]  125.48,63.75 180 top
U21  MAX17048  [DFN-8]  51.31,87.12 0 top
U22  3.3V  [SOT23-5]  20.83,90.93 180 top
U23  AP7361C-33  [UDFN-8]  42.42,87.12 0 top
U24  MCP73831  [SOT23-5]  30.99,87.12 180 top
U25  MAX17048  [DFN-8]  145.8,87.12 0 top
U26  3.3V  [SOT23-5]  115.32,90.93 180 top
U27  MCP73831  [SOT23-5]  30.99,17.02 180 top
U28  AP7361C-33  [UDFN-8]  136.91,87.12 0 top
U29  MCP73831  [SOT23-5]  125.48,87.12 180 top
U30  MAX17048  [DFN-8]  51.31,110.49 0 top
U31  3.3V  [SOT23-5]  20.83,114.3 180 top
U32  AP7361C-33  [UDFN-8]  42.42,110.49 0 top
U33  MCP73831  [SOT23-5]  30.99,110.49 180 top
U34  MAX17048  [DFN-8]  51.31,17.02 0 top
U35  MAX17048  [DFN-8]  145.8,110.49 0 top
U36  3.3V  [SOT23-5]  115.32,114.3 180 top
U37  AP7361C-33  [UDFN-8]  136.91,110.49 0 top
U38  MCP73831  [SOT23-5]  125.48,110.49 180 top
U44  3.3V  [SOT23-5]  20.83,20.83 180 top
U64  AP7361C-33  [UDFN-8]  42.42,17.02 0 top
U$1  SPARKX-LOGO5  [SPARKX-LARGE]  66.55,18.29 90 top
U$2  SPARKX-LOGO5  [SPARKX-LARGE]  70.36,19.56 0 bottom
U$3  [##BT##11]  61.47,8.51 90 top
U$4  [#TX#9]  58.93,8.51 90 top
U$5  [#RX#8]  56.39,8.51 90 top
U$6  [#CIPO#7]  53.85,8.51 90 top
U$7  [#COPI#6]  51.31,8.51 90 top
U$8  [#SCK#5]  48.77,8.51 90 top
U$9  [#D1#5]  46.23,8.51 90 top
U$10  [#D0#5]  43.69,8.51 90 top
U$11  [#PWM0#5]  38.61,8.51 90 top
U$12  [#PWM1#5]  41.15,8.51 90 top
U$13  [#A1#5]  36.07,8.51 90 top
U$14  [#A0#5]  33.53,8.51 90 top
U$15  [#GND#4]  30.99,8.51 90 top
U$16  [#3#3V#1]  25.91,8.51 90 top
U$17  [##RST##0]  23.37,8.51 90 top
U$18  [#MEAS#25]  24.38,15.49 0 top
U$19  [CHG20]  35.05,14.61 0 top
U$20  [RESET19]  55.88,17.78 90 top
U$21  [BOOT18]  55.88,12.45 90 top
U$22  [#VBT#16]  33.53,28.07 90 top
U$23  [#EN#15]  36.07,28.07 90 top
U$24  [#G0#14]  41.15,28.07 90 top
U$25  [#G1#14]  43.69,28.07 90 top
U$26  [#G2#14]  46.23,28.07 90 top
U$27  [#G3#14]  48.77,28.07 90 top
U$28  [#G4#14]  51.31,28.07 90 top
U$29  [#G5#14]  53.85,28.07 90 top
U$30  [#G6#14]  56.39,28.07 90 top
U$31  [#SCL#13]  58.93,28.07 90 top
U$32  [#SDA#12]  61.47,28.07 90 top
U$33  [3#3V22]  47.75,20.83 0 top
U$34  [VIN21]  52.58,20.83 0 top
U$35  [#VUB#15]  38.61,28.07 90 top
U$36  [THINGPLUS29]  97.03,24.38 90 top
U$37  [MICROMOD30]  99.31,24.38 90 top
U$38  [#31]  29.46,22.1 0 top
U$39  [#33]  25.15,22.1 0 top
U$40  [#BYP#27]  16.51,25.15 0 top
U$41  [#VE#16]  31.75,13.97 0 bottom
U$42  [#TX#9]  58.93,8.51 90 bottom
U$43  [#RX#8]  56.39,8.51 90 bottom
U$44  [#CIPO#7]  53.85,8.51 90 bottom
U$45  [#COPI#6]  51.31,8.51 90 bottom
U$46  [#SCK#5]  48.77,8.51 90 bottom
U$47  [#D1#5]  46.23,8.51 90 bottom
U$48  [#D0#5]  43.69,8.51 90 bottom
U$49  [#PWM0#5]  38.61,8.51 90 bottom
U$50  [#PWM1#5]  41.15,8.51 90 bottom
U$51  [#A1#5]  36.07,8.51 90 bottom
U$52  [#A0#5]  33.53,8.51 90 bottom
U$53  [#GND#4]  30.99,8.51 90 bottom
U$54  [#3#3V#1]  25.91,8.51 90 bottom
U$55  [##RST##0]  23.37,8.51 90 bottom
U$56  [##BOOT##10]  61.47,8.51 90 bottom
U$57  [#VBT#16]  33.53,28.07 90 bottom
U$58  [#EN#15]  36.07,28.07 90 bottom
U$59  [#G0#14]  41.15,28.07 90 bottom
U$60  [#G1#14]  43.69,28.07 90 bottom
U$61  [#G2#14]  46.23,28.07 90 bottom
U$62  [#G3#14]  48.77,28.07 90 bottom
U$63  [#G4#14]  51.31,28.07 90 bottom
U$64  [#G5#14]  53.85,28.07 90 bottom
U$65  [#G6#14]  56.39,28.07 90 bottom
U$66  [#MEAS#25]  24.38,19.05 0 bottom
U$67  [#SDA#12]  61.47,28.07 90 bottom
U$68  [#VUB#15]  38.61,28.07 90 bottom
U$69  [#3#3V_LED#25]  46.61,20.83 0 bottom
U$70  [#VIN_LED#25]  46.61,23.37 0 bottom
U$71  [#SCL#G7#14]  58.93,28.07 90 bottom
U$72  [#I2C#27]  48.89,17.02 0 bottom
U$73  [THINGPLUS_MICROMOD29]  66.55,16.26 0 bottom
U$74  [#SCL#G7#27]  58.8,19.56 0 bottom
U$75  SPARKX-LOGO5  [SPARKX-LARGE]  161.04,18.29 90 top
U$76  SPARKX-LOGO5  [SPARKX-LARGE]  164.85,19.56 0 bottom
U$77  [##BT##11]  155.96,8.51 90 top
U$78  [#TX#9]  153.42,8.51 90 top
U$79  [#RX#8]  150.88,8.51 90 top
U$80  [#CIPO#7]  148.34,8.51 90 top
U$81  [#COPI#6]  145.8,8.51 90 top
U$82  [#SCK#5]  143.26,8.51 90 top
U$83  [#D1#5]  140.72,8.51 90 top
U$84  [#D0#5]  138.18,8.51 90 top
U$85  [#PWM0#5]  133.1,8.51 90 top
U$86  [#PWM1#5]  135.64,8.51 90 top
U$87  [#A1#5]  130.56,8.51 90 top
U$88  [#A0#5]  128.02,8.51 90 top
U$89  [#GND#4]  125.48,8.51 90 top
U$90  [#3#3V#1]  120.4,8.51 90 top
U$91  [##RST##0]  117.86,8.51 90 top
U$92  [#MEAS#25]  118.87,15.49 0 top
U$93  [CHG20]  129.54,14.61 0 top
U$94  [RESET19]  150.37,17.78 90 top
U$95  [BOOT18]  150.37,12.45 90 top
U$96  [#VBT#16]  128.02,28.07 90 top
U$97  [#EN#15]  130.56,28.07 90 top
U$98  [#G0#14]  135.64,28.07 90 top
U$99  [#G1#14]  138.18,28.07 90 top
U$100  [#G2#14]  140.72,28.07 90 top
U$101  [#G3#14]  143.26,28.07 90 top
U$102  [#G4#14]  145.8,28.07 90 top
U$103  [#G5#14]  148.34,28.07 90 top
U$104  [#G6#14]  150.88,28.07 90 top
U$105  [#SCL#13]  153.42,28.07 90 top
U$106  [#SDA#12]  155.96,28.07 90 top
U$107  [3#3V22]  142.24,20.83 0 top
U$108  [VIN21]  147.07,20.83 0 top
U$109  [#VUB#15]  133.1,28.07 90 top
U$110  [THINGPLUS29]  191.52,24.38 90 top
U$111  [MICROMOD30]  193.8,24.38 90 top
U$112  [#31]  123.95,22.1 0 top
U$113  [#BYP#27]  111,25.15 0 top
U$114  [#TX#9]  153.42,8.51 90 bottom
U$115  [#RX#8]  150.88,8.51 90 bottom
U$116  [#CIPO#7]  148.34,8.51 90 bottom
U$117  [#COPI#6]  145.8,8.51 90 bottom
U$118  [#SCK#5]  143.26,8.51 90 bottom
U$119  [#D1#5]  140.72,8.51 90 bottom
U$120  [#D0#5]  138.18,8.51 90 bottom
U$121  [#PWM0#5]  133.1,8.51 90 bottom
U$122  [#PWM1#5]  135.64,8.51 90 bottom
U$123  [#A1#5]  130.56,8.51 90 bottom
U$124  [#A0#5]  128.02,8.51 90 bottom
U$125  [#GND#4]  125.48,8.51 90 bottom
U$126  [#3#3V#1]  120.4,8.51 90 bottom
U$127  [##RST##0]  117.86,8.51 90 bottom
U$128  [##BOOT##10]  155.96,8.51 90 bottom
U$129  [#VBT#16]  128.02,28.07 90 bottom
U$130  [#EN#15]  130.56,28.07 90 bottom
U$131  [#G0#14]  135.64,28.07 90 bottom
U$132  [#G1#14]  138.18,28.07 90 bottom
U$133  [#G2#14]  140.72,28.07 90 bottom
U$134  [#G3#14]  143.26,28.07 90 bottom
U$135  [#G4#14]  145.8,28.07 90 bottom
U$136  [#G5#14]  148.34,28.07 90 bottom
U$137  [#G6#14]  150.88,28.07 90 bottom
U$138  [#SDA#12]  155.96,28.07 90 bottom
U$139  [#VUB#15]  133.1,28.07 90 bottom
U$140  [#MEAS#25]  118.87,19.05 0 bottom
U$141  [#3#3V_LED#25]  141.1,20.83 0 bottom
U$142  [#I2C#27]  143.38,17.02 0 bottom
U$143  [#VIN_LED#25]  141.1,23.37 0 bottom
U$144  [#SCL#G7#27]  153.29,19.56 0 bottom
U$145  [#SCL#G7#14]  153.42,28.07 90 bottom
U$146  [THINGPLUS_MICROMOD29]  161.04,16.26 0 bottom
U$147  [#VE#16]  126.24,13.97 0 bottom
U$148  [#33]  119.63,22.1 0 top
U$149  SPARKX-LOGO5  [SPARKX-LARGE]  66.55,41.66 90 top
U$150  SPARKX-LOGO5  [SPARKX-LARGE]  70.36,42.93 0 bottom
U$151  [##BT##11]  61.47,31.88 90 top
U$152  [#TX#9]  58.93,31.88 90 top
U$153  [#RX#8]  56.39,31.88 90 top
U$154  [#CIPO#7]  53.85,31.88 90 top
U$155  [#COPI#6]  51.31,31.88 90 top
U$156  [#SCK#5]  48.77,31.88 90 top
U$157  [#D1#5]  46.23,31.88 90 top
U$158  [#D0#5]  43.69,31.88 90 top
U$159  [#PWM0#5]  38.61,31.88 90 top
U$160  [#PWM1#5]  41.15,31.88 90 top
U$161  [#A1#5]  36.07,31.88 90 top
U$162  [#A0#5]  33.53,31.88 90 top
U$163  [#GND#4]  30.99,31.88 90 top
U$164  [#3#3V#1]  25.91,31.88 90 top
U$165  [##RST##0]  23.37,31.88 90 top
U$166  [#MEAS#25]  24.38,38.86 0 top
U$167  [CHG20]  35.05,37.97 0 top
U$168  [RESET19]  55.88,41.15 90 top
U$169  [BOOT18]  55.88,35.81 90 top
U$170  [#VBT#16]  33.53,51.43 90 top
U$171  [#EN#15]  36.07,51.43 90 top
U$172  [#G0#14]  41.15,51.43 90 top
U$173  [#G1#14]  43.69,51.43 90 top
U$174  [#G2#14]  46.23,51.43 90 top
U$175  [#G3#14]  48.77,51.43 90 top
U$176  [#G4#14]  51.31,51.43 90 top
U$177  [#G5#14]  53.85,51.43 90 top
U$178  [#G6#14]  56.39,51.43 90 top
U$179  [#SCL#13]  58.93,51.43 90 top
U$180  [#SDA#12]  61.47,51.43 90 top
U$181  [3#3V22]  47.75,44.2 0 top
U$182  [VIN21]  52.58,44.2 0 top
U$183  [#VUB#15]  38.61,51.43 90 top
U$184  [THINGPLUS29]  97.03,47.75 90 top
U$185  [MICROMOD30]  99.31,47.75 90 top
U$186  [#31]  29.46,45.47 0 top
U$187  [#BYP#27]  16.51,48.51 0 top
U$188  [#TX#9]  58.93,31.88 90 bottom
U$189  [#RX#8]  56.39,31.88 90 bottom
U$190  [#CIPO#7]  53.85,31.88 90 bottom
U$191  [#COPI#6]  51.31,31.88 90 bottom
U$192  [#SCK#5]  48.77,31.88 90 bottom
U$193  [#D1#5]  46.23,31.88 90 bottom
U$194  [#D0#5]  43.69,31.88 90 bottom
U$195  [#PWM0#5]  38.61,31.88 90 bottom
U$196  [#PWM1#5]  41.15,31.88 90 bottom
U$197  [#A1#5]  36.07,31.88 90 bottom
U$198  [#A0#5]  33.53,31.88 90 bottom
U$199  [#GND#4]  30.99,31.88 90 bottom
U$200  [#3#3V#1]  25.91,31.88 90 bottom
U$201  [##RST##0]  23.37,31.88 90 bottom
U$202  [##BOOT##10]  61.47,31.88 90 bottom
U$203  [#VBT#16]  33.53,51.43 90 bottom
U$204  [#EN#15]  36.07,51.43 90 bottom
U$205  [#G0#14]  41.15,51.43 90 bottom
U$206  [#G1#14]  43.69,51.43 90 bottom
U$207  [#G2#14]  46.23,51.43 90 bottom
U$208  [#G3#14]  48.77,51.43 90 bottom
U$209  [#G4#14]  51.31,51.43 90 bottom
U$210  [#G5#14]  53.85,51.43 90 bottom
U$211  [#G6#14]  56.39,51.43 90 bottom
U$212  [#SDA#12]  61.47,51.43 90 bottom
U$213  [#VUB#15]  38.61,51.43 90 bottom
U$214  [#MEAS#25]  24.38,42.42 0 bottom
U$215  [#3#3V_LED#25]  46.61,44.2 0 bottom
U$216  [#I2C#27]  48.89,40.39 0 bottom
U$217  [#VIN_LED#25]  46.61,46.74 0 bottom
U$218  [#SCL#G7#27]  58.8,42.93 0 bottom
U$219  [#SCL#G7#14]  58.93,51.43 90 bottom
U$220  [THINGPLUS_MICROMOD29]  66.55,39.62 0 bottom
U$221  [#VE#16]  31.75,37.34 0 bottom
U$222  [#33]  25.15,45.47 0 top
U$223  SPARKX-LOGO5  [SPARKX-LARGE]  161.04,41.66 90 top
U$224  SPARKX-LOGO5  [SPARKX-LARGE]  164.85,42.93 0 bottom
U$225  [##BT##11]  155.96,31.88 90 top
U$226  [#TX#9]  153.42,31.88 90 top
U$227  [#RX#8]  150.88,31.88 90 top
U$228  [#CIPO#7]  148.34,31.88 90 top
U$229  [#COPI#6]  145.8,31.88 90 top
U$230  [#SCK#5]  143.26,31.88 90 top
U$231  [#D1#5]  140.72,31.88 90 top
U$232  [#D0#5]  138.18,31.88 90 top
U$233  [#PWM0#5]  133.1,31.88 90 top
U$234  [#PWM1#5]  135.64,31.88 90 top
U$235  [#A1#5]  130.56,31.88 90 top
U$236  [#A0#5]  128.02,31.88 90 top
U$237  [#GND#4]  125.48,31.88 90 top
U$238  [#3#3V#1]  120.4,31.88 90 top
U$239  [##RST##0]  117.86,31.88 90 top
U$240  [#MEAS#25]  118.87,38.86 0 top
U$241  [CHG20]  129.54,37.97 0 top
U$242  [RESET19]  150.37,41.15 90 top
U$243  [BOOT18]  150.37,35.81 90 top
U$244  [#VBT#16]  128.02,51.43 90 top
U$245  [#EN#15]  130.56,51.43 90 top
U$246  [#G0#14]  135.64,51.43 90 top
U$247  [#G1#14]  138.18,51.43 90 top
U$248  [#G2#14]  140.72,51.43 90 top
U$249  [#G3#14]  143.26,51.43 90 top
U$250  [#G4#14]  145.8,51.43 90 top
U$251  [#G5#14]  148.34,51.43 90 top
U$252  [#G6#14]  150.88,51.43 90 top
U$253  [#SCL#13]  153.42,51.43 90 top
U$254  [#SDA#12]  155.96,51.43 90 top
U$255  [3#3V22]  142.24,44.2 0 top
U$256  [VIN21]  147.07,44.2 0 top
U$257  [#VUB#15]  133.1,51.43 90 top
U$258  [THINGPLUS29]  191.52,47.75 90 top
U$259  [MICROMOD30]  193.8,47.75 90 top
U$260  [#31]  123.95,45.47 0 top
U$261  [#BYP#27]  111,48.51 0 top
U$262  [#TX#9]  153.42,31.88 90 bottom
U$263  [#RX#8]  150.88,31.88 90 bottom
U$264  [#CIPO#7]  148.34,31.88 90 bottom
U$265  [#COPI#6]  145.8,31.88 90 bottom
U$266  [#SCK#5]  143.26,31.88 90 bottom
U$267  [#D1#5]  140.72,31.88 90 bottom
U$268  [#D0#5]  138.18,31.88 90 bottom
U$269  [#PWM0#5]  133.1,31.88 90 bottom
U$270  [#PWM1#5]  135.64,31.88 90 bottom
U$271  [#A1#5]  130.56,31.88 90 bottom
U$272  [#A0#5]  128.02,31.88 90 bottom
U$273  [#GND#4]  125.48,31.88 90 bottom
U$274  [#3#3V#1]  120.4,31.88 90 bottom
U$275  [##RST##0]  117.86,31.88 90 bottom
U$276  [##BOOT##10]  155.96,31.88 90 bottom
U$277  [#VBT#16]  128.02,51.43 90 bottom
U$278  [#EN#15]  130.56,51.43 90 bottom
U$279  [#G0#14]  135.64,51.43 90 bottom
U$280  [#G1#14]  138.18,51.43 90 bottom
U$281  [#G2#14]  140.72,51.43 90 bottom
U$282  [#G3#14]  143.26,51.43 90 bottom
U$283  [#G4#14]  145.8,51.43 90 bottom
U$284  [#G5#14]  148.34,51.43 90 bottom
U$285  [#G6#14]  150.88,51.43 90 bottom
U$286  [#SDA#12]  155.96,51.43 90 bottom
U$287  [#VUB#15]  133.1,51.43 90 bottom
U$288  [#MEAS#25]  118.87,42.42 0 bottom
U$289  [#3#3V_LED#25]  141.1,44.2 0 bottom
U$290  [#I2C#27]  143.38,40.39 0 bottom